# Altium PCB M1-Test-Board.PcbDoc (part 1 of 5)
Units mil, origin at the board's own origin, x right, y up, seen from the top; angles counter-clockwise.
Board outline 3977 x 5000 mil, 4 copper layers (Top, GND Layer 2, Power Layer 3, Bottom), stack 60 mil thick; 191 components, 124 nets, 579 pads, 189 vias.
Unrouted connection lines stored in the file: 80.
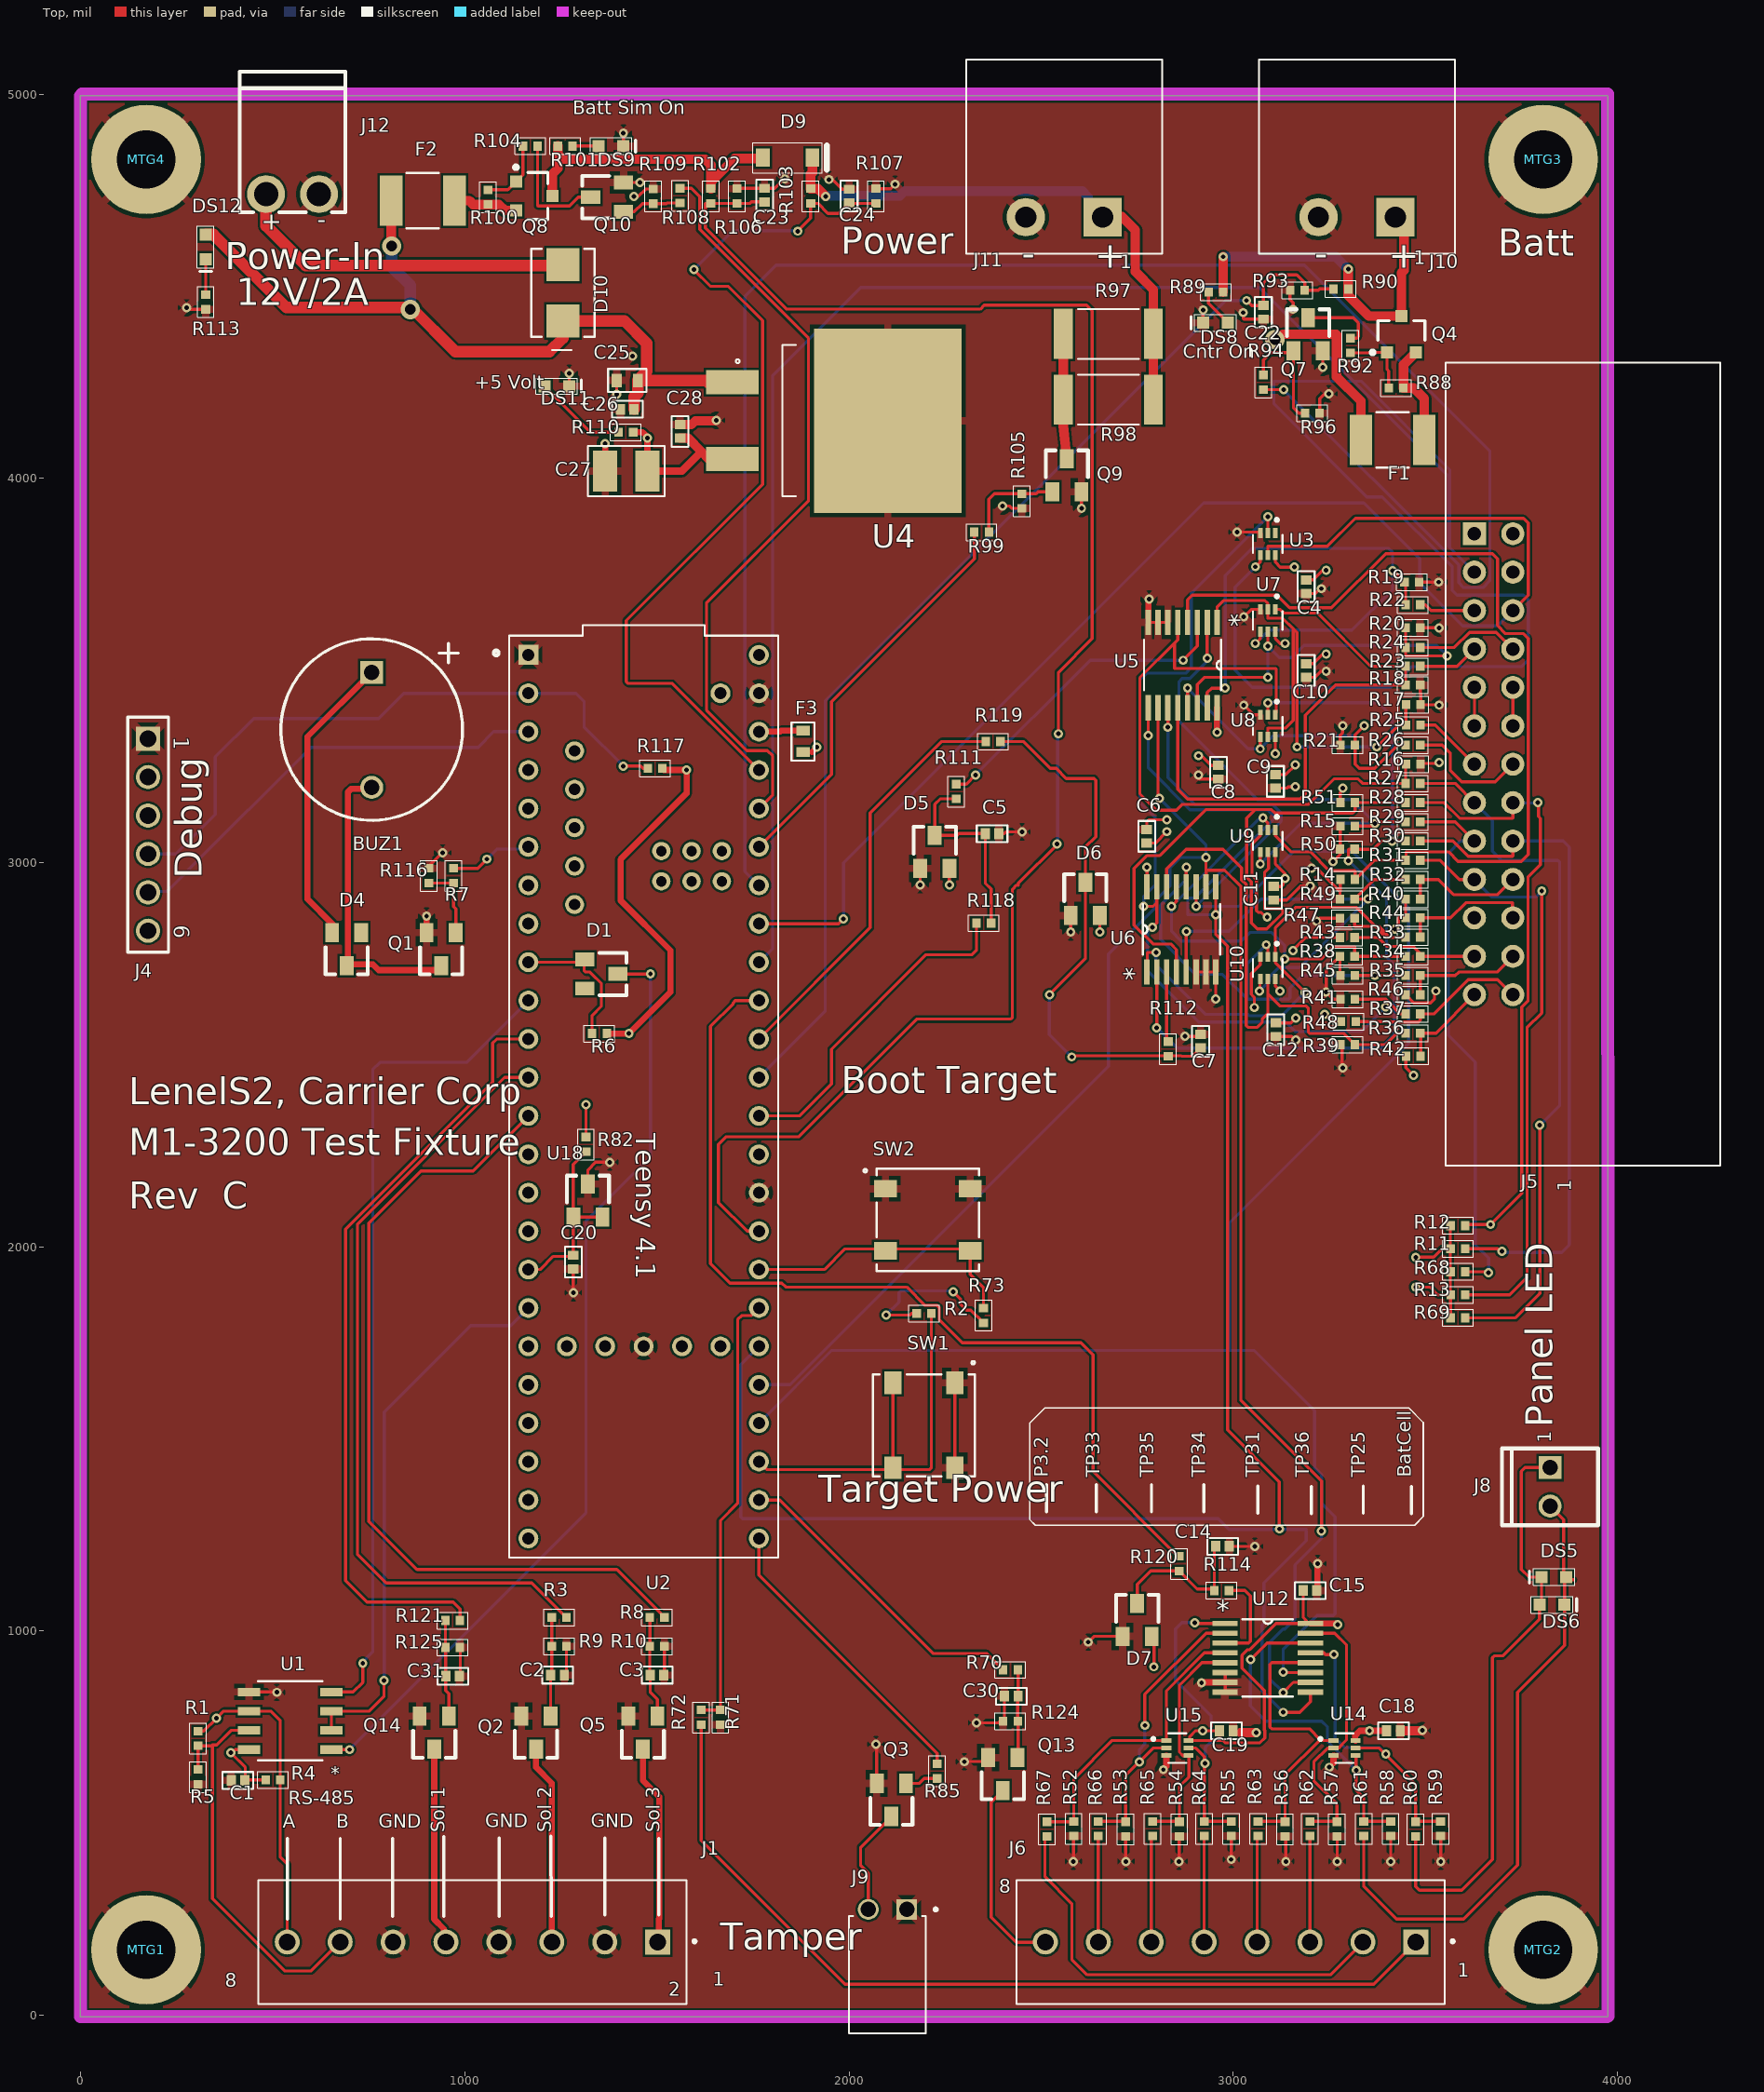
[diagram p0: Top view]
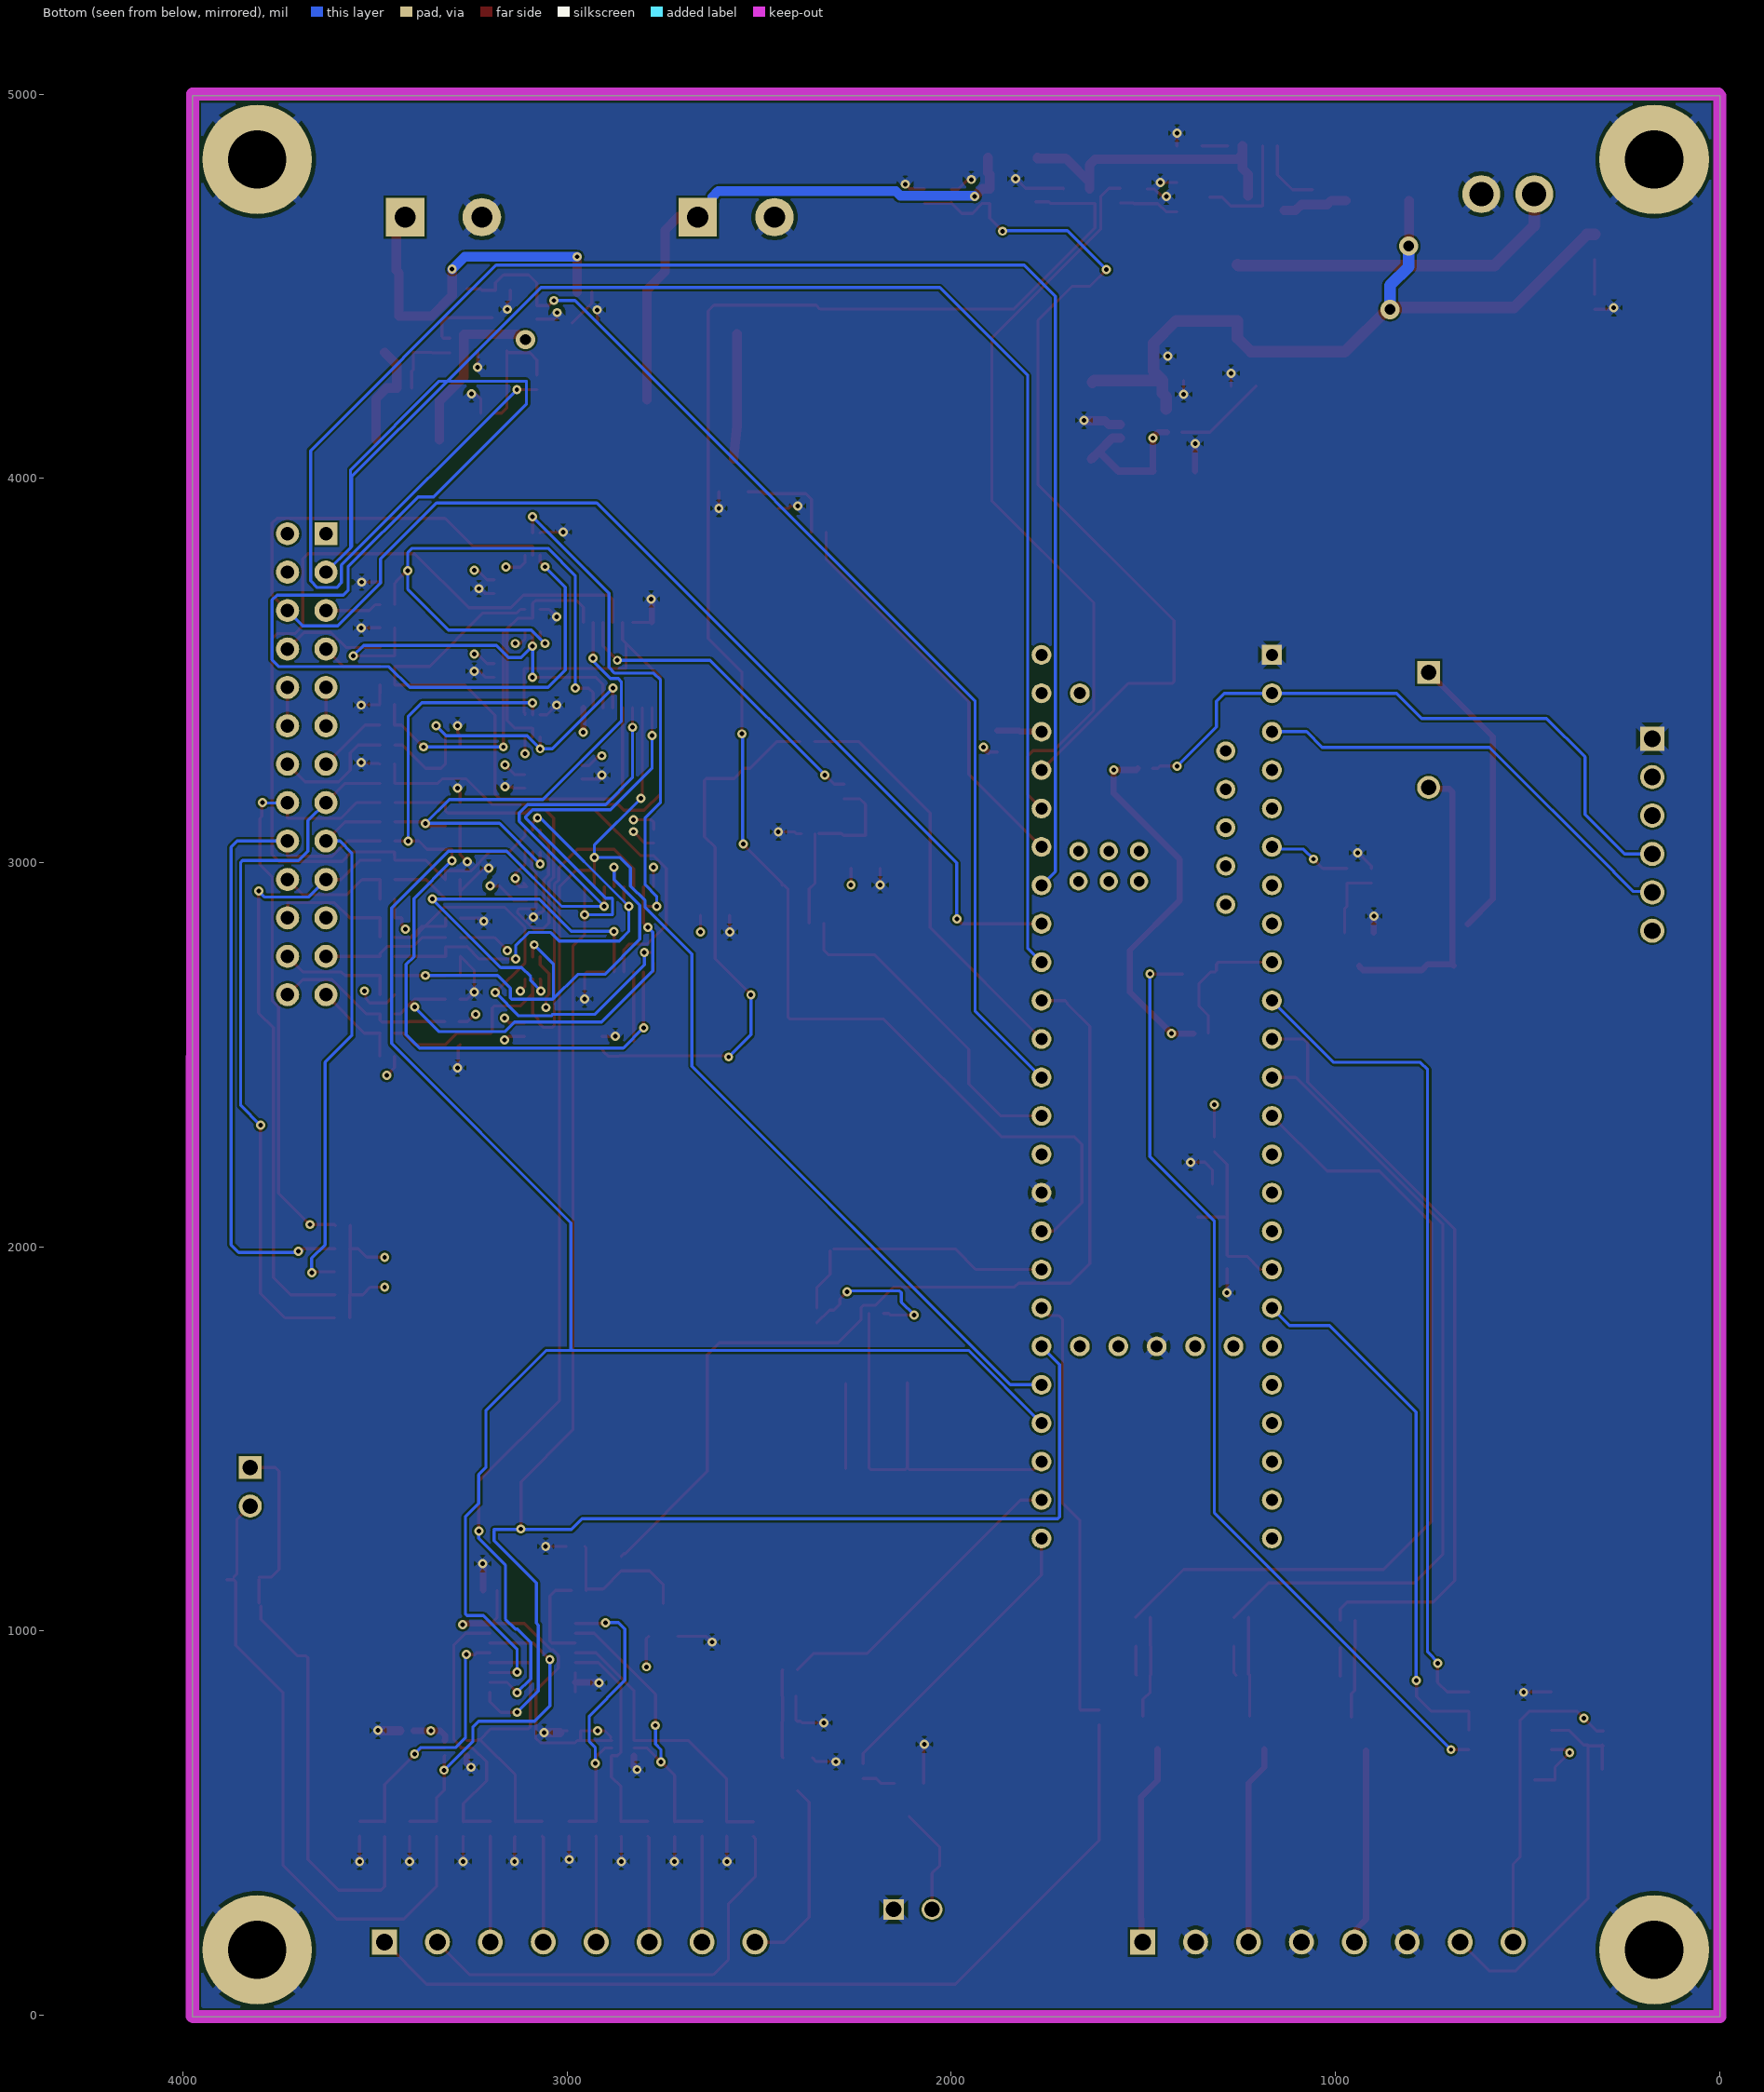
[diagram p1: Bottom view, seen from below]
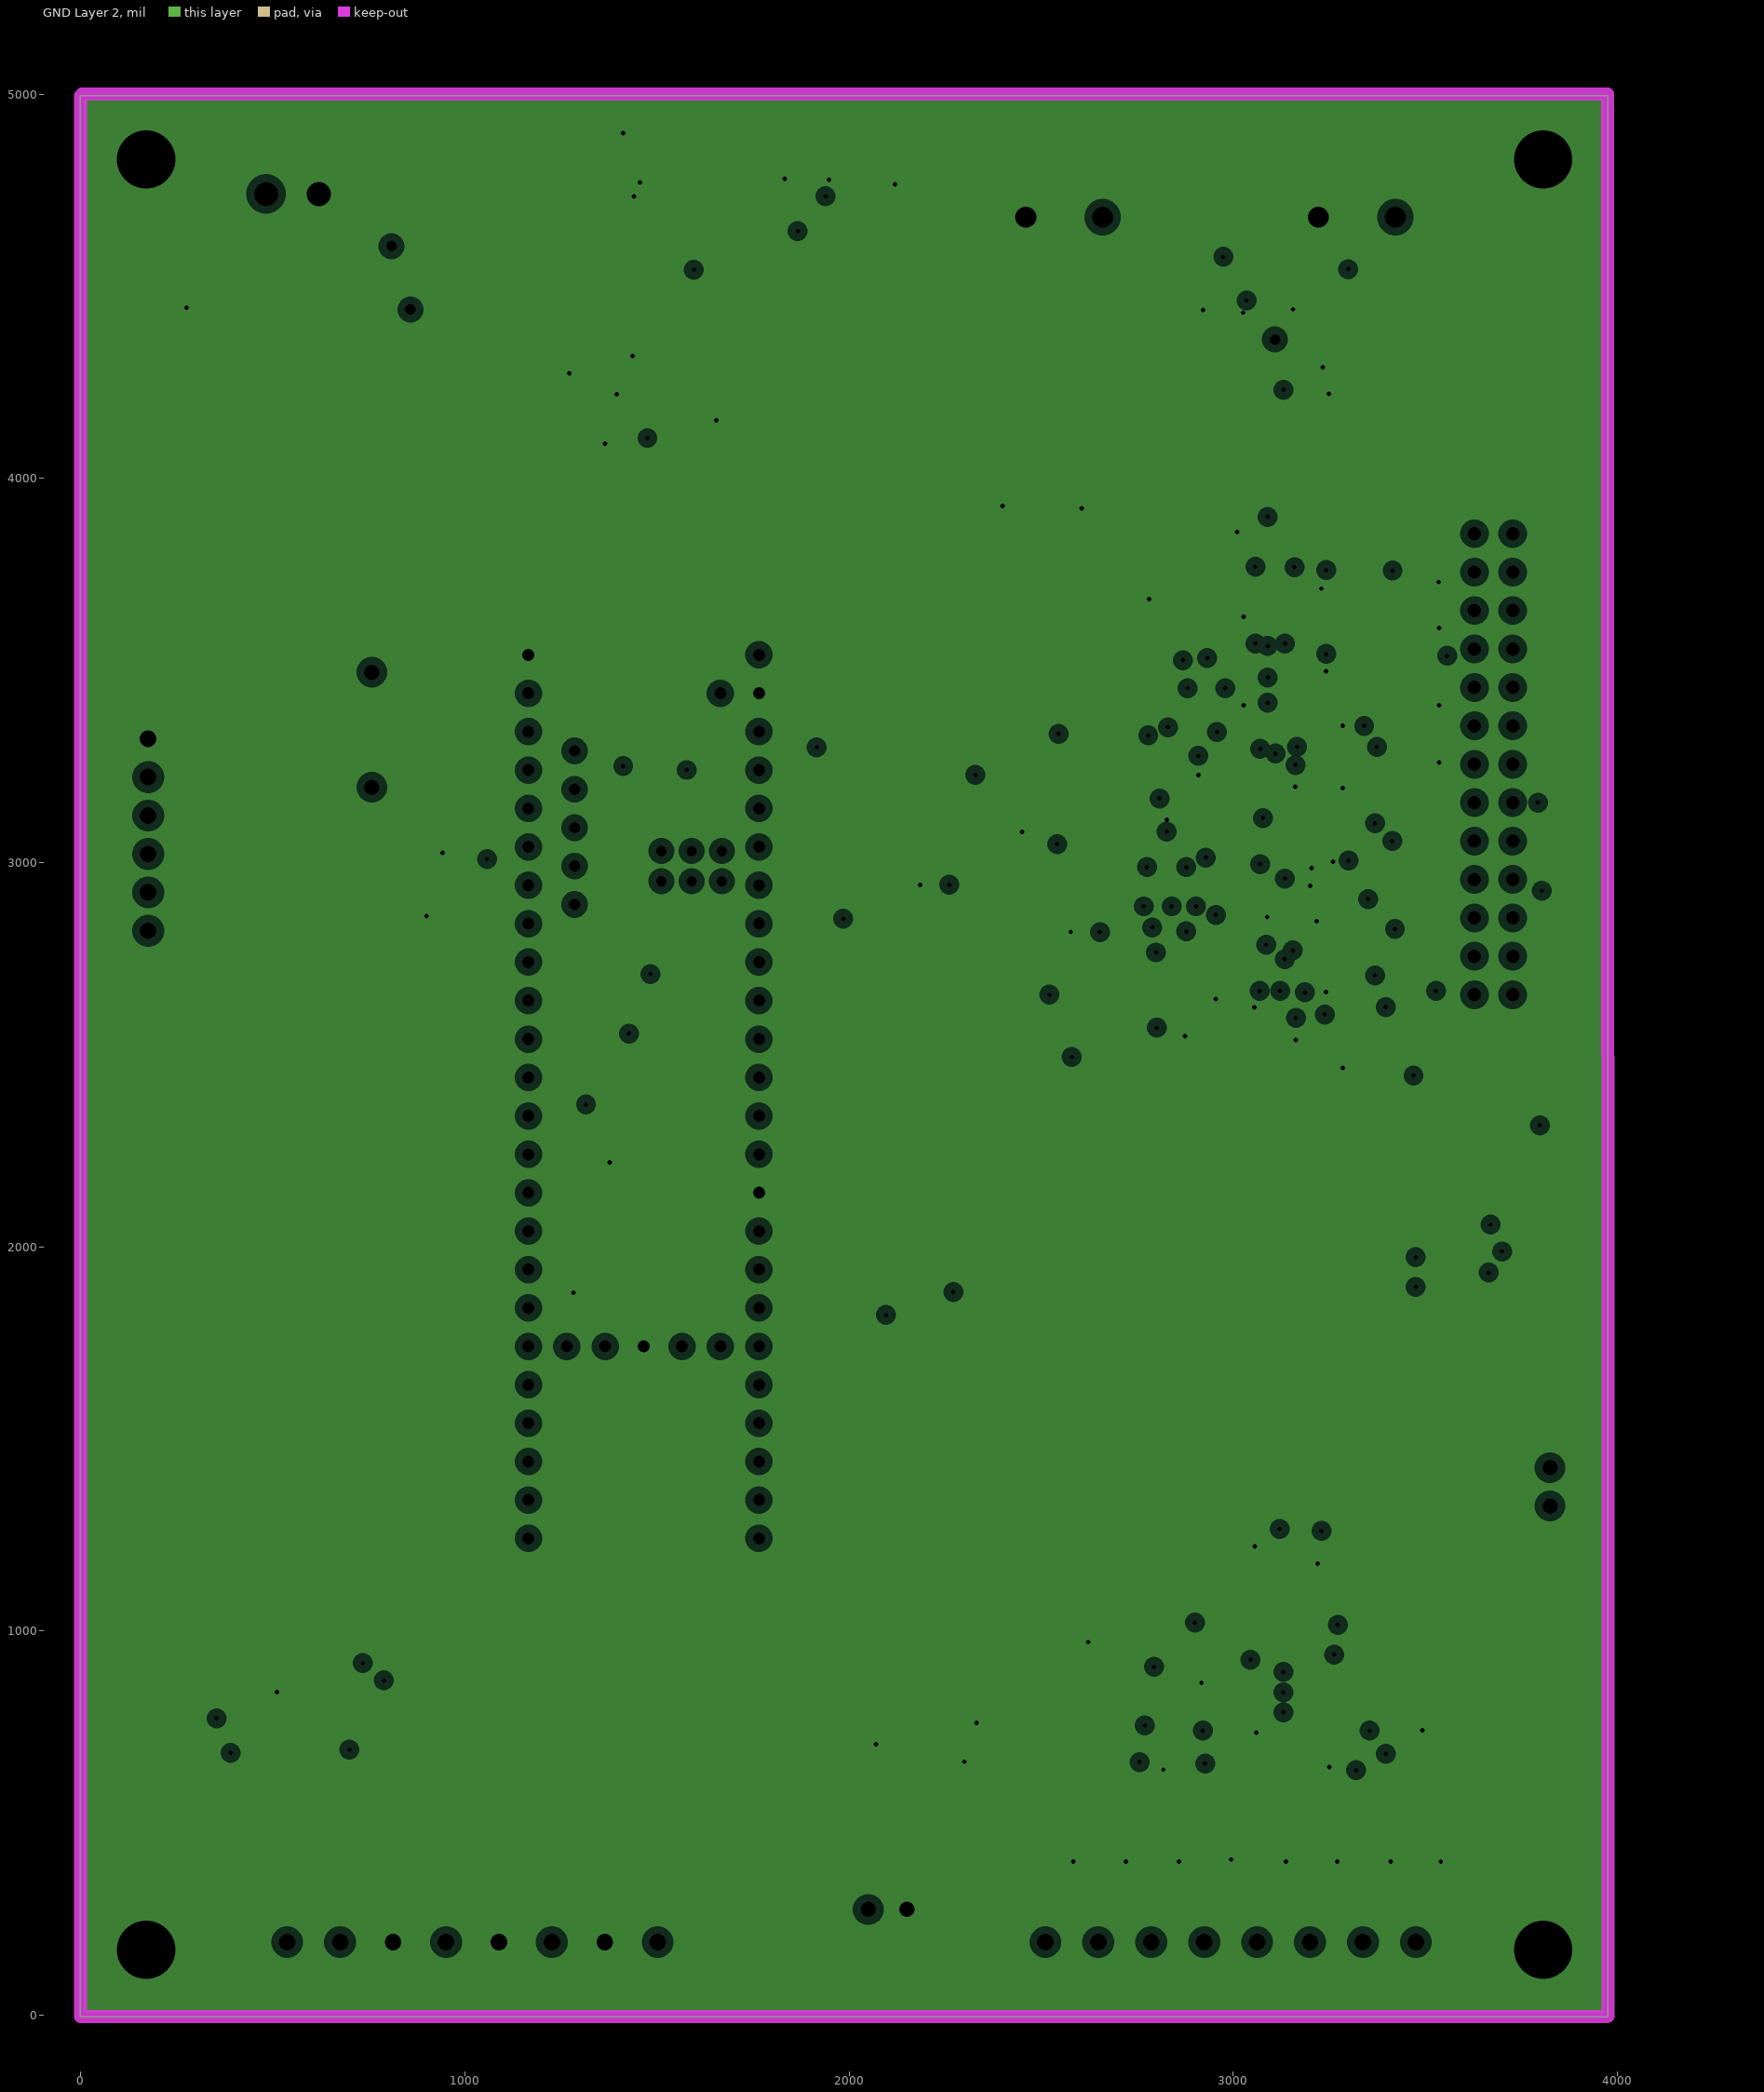
[diagram p2: GND Layer 2, clearances drawn from the general rule]
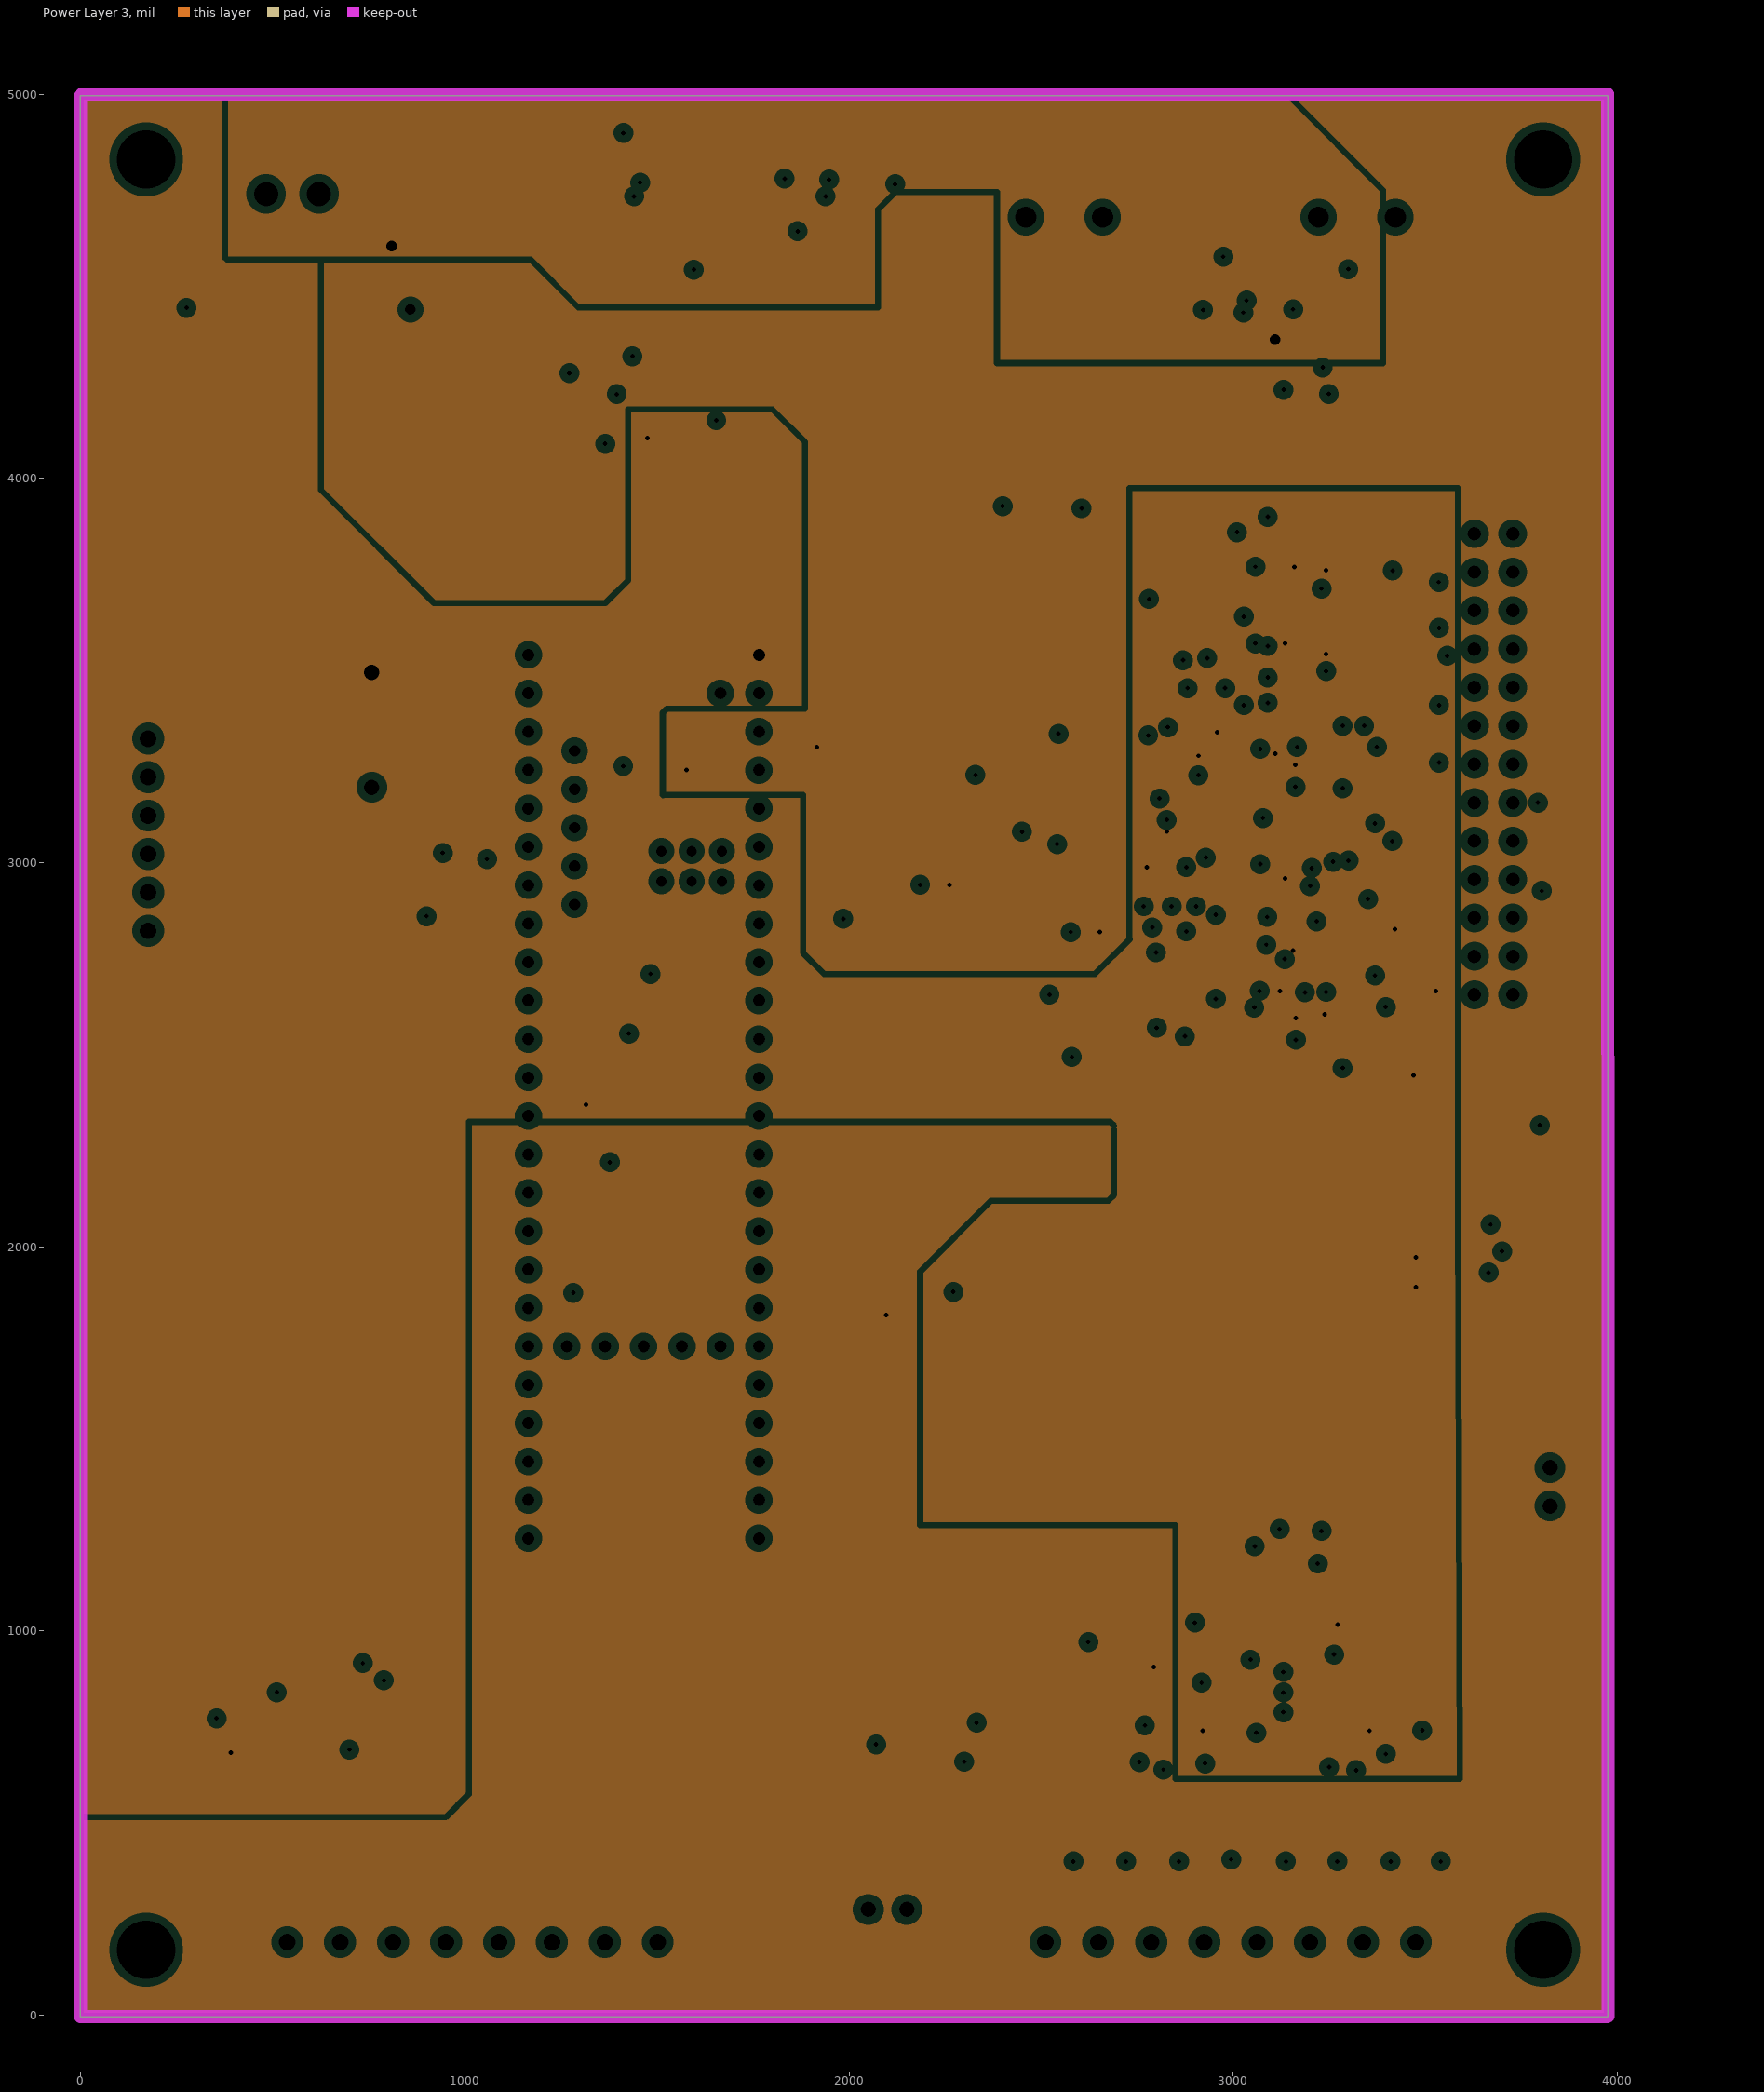
[diagram p3: Power Layer 3, clearances drawn from the general rule]

## Layer stack, top to bottom
Solder Mask Top: solder mask 1, Solder Resist, Dk 3.2
Top: signal copper 0.7
Dielectric 1: prepreg 9.1, 2 x 2116, Dk 4.3
GND Layer 2: plane copper 0.7, net GND
Dielectric2: core 39, Core, Dk 4.6
Power Layer 3: plane copper 0.7, net (Multiple Nets)
Dielectric3: prepreg 9.1, 2 x 2116, Dk 4.3
Bottom: signal copper 0.7
Solder Mask Bottom: solder mask 1, Solder Resist, Dk 3.2

## Board outline
3975,-4 -2,-4 -2,4996 3975,4996

## Design rules (kind name [scope] priority, off if disabled: settings)
BoardOutlineClearance BoardOutlineClearance_1 [InComponent('J5') or InComponent('J10') or InComponent('J11') or  InComponent('J8') or  InComponent('J9') or  InComponent('J1') or  InComponent('J2') or   InComponent('J3') or  InComponent('J12')] p1: gap=0 ignorepadtopadclearanceinfootprint=FALSE
BoardOutlineClearance [All] p2: gap=17 ignorepadtopadclearanceinfootprint=FALSE
Clearance "Clearance NPH" [InNet('NetMTG1_1') or InNet('NetMTG4_1') or InNet('NetMTG2_1') or InNet('NetMTG3_1')] p1: gap=10 ignorepadtopadclearanceinfootprint=FALSE
Clearance "Via in PAd U1" [IsVia and InNet('GND') vs IsSMTPin AND InComponent('U1')] p2: gap=0 ignorepadtopadclearanceinfootprint=TRUE
Clearance "Via in PAd U12" [IsVia and InNet('GND') vs IsSMTPin AND InComponent('U12')] p3: gap=0 ignorepadtopadclearanceinfootprint=TRUE
Clearance "Clearance - NetClass - DIF-PAIRS" [InNetClass('DIF-PAIRS')] p4: gap=6 ignorepadtopadclearanceinfootprint=FALSE
Clearance "Clearance - Default - DEFAULT - Via" [IsVia vs IsVia] p5: gap=6 ignorepadtopadclearanceinfootprint=FALSE
Clearance "Clearance - Default - DEFAULT- SMD" [IsVia vs IsSMTPin] p6: gap=6 ignorepadtopadclearanceinfootprint=TRUE
Clearance "Clearance - Default - DEFAULT - Net_1" [All] p7: gap=5.5 ignorepadtopadclearanceinfootprint=FALSE
ComponentClearance "ComponentClearance - Default - DEFAULT" [All] p1: gap=7 collisioncheckmode=3 verticalgap=10 showdistances=FALSE
DiffPairsRouting DiffPair_100DiffPairsRouting [InDifferentialPairClass('diffpair_100')] p1: maxlimit=6.5 minlimit=6.5 mostfreqgap=6.5 toplayer_minwidth=8 toplayer_maxwidth=8 toplayer_prefwidth=8 bottomlayer_minwidth=8 bottomlayer_maxwidth=8 bottomlayer_prefwidth=8 maxuncoupledlength=500
FanoutControl Fanout_SOIC [IsSOIC] p1: bgadir=Out bgaviamode=Centered fanoutstyle=Auto fanoutdirection=Alternating viagrid=1 // Fanout_SOIC (Default Rule)
FanoutControl Fanout_Small [(CompPinCount < 5)] p2: bgadir=Out bgaviamode=Centered fanoutstyle=Auto fanoutdirection=OutThenIn viagrid=1 // Fanout_Small (Default Rule)
FanoutControl Fanout_LCC [IsLCC] p3: bgadir=Out bgaviamode=Centered fanoutstyle=Auto fanoutdirection=Alternating viagrid=1 // Fanout_LCC (Default Rule)
FanoutControl Fanout_BGA [IsBGA] p4: bgadir=Out bgaviamode=Centered fanoutstyle=Auto fanoutdirection=Alternating viagrid=1 // Fanout_BGA (Default Rule)
HoleSize [All] p1: absolutevalues=TRUE maxlimit=180 minlimit=1 maxpercent=80.000 minpercent=20.000
HoleToHoleClearance "HoleToHoleClearance - Default - DEFAULT" [All] p1: gap=7 allowstackedmicrovias=TRUE
Length "Default Length" [All] p1: maxlimit=50000 minlimit=0
MatchedLengths DiffPair_100MatchedLengths [InDifferentialPairClass('diffpair_100')] p1: tolerance=10 checknetsindiffpair=TRUE checkdiffpairvsdiffpair=FALSE checkxsignals=FALSE checkothers=FALSE
MaxMinImpedance "Default Impedance" [All] p1: minimum=50.00 maximum=150.0
MinimumAnnularRing [All] p1: minimumring=6
MinimumSolderMaskSliver [All] p1: minsoldermaskwidth=1
ParallelSegment "Default Parallel Segment Same Layer" [All] p1: limit=1000 gap=20
ParallelSegment "Default Parallel Segment Adjasent" [All] p2: limit=1000 gap=200
PlaneClearance "PlaneClearance - FootPrint 'RJ45$2F$SI-46001'" [HasFootprint('RJ45$2F$SI-46001')] p1: clearance=15 // PAD - Power Plane Clearance
PlaneConnect "Default PlaneConnect" [All] p1: planeconnectstyle=Relief reliefexpansion=20 reliefentries=4 reliefconductorwidth=20 reliefairgap=10
PolygonConnect "PolygonConnect - Default SMT" [IsSMTPin] p1: connectstyle=Relief reliefconductorwidth=20 reliefentries=4 polygonreliefangle="90 Angle" airgapwidth=10
PolygonConnect "PolygonConnect - Default Pad" [All] p2: connectstyle=Relief reliefconductorwidth=20 reliefentries=4 polygonreliefangle="45 Angle" airgapwidth=10
RoutingLayers "RoutingLayers - Default - DEFAULT" [All] p1: top layer_v5=TRUE bottom layer_v5=TRUE
RoutingPriority "RoutingPriority - Default - DEFAULT" [All] p1: routingpriority=3
RoutingTopology "Default Routing Topology" [All] p1: topology=Shortest
RoutingVias "RoutingVias - Default - DEFAULT" [All] p1: holewidth=12 width=24 viastyle="Through Hole" minholewidth=12 minwidth=24 maxholewidth=20 maxwidth=40
SMDToCorner "SMDToCorner - Default - DEFAULT" [All] p1: distance=20000
SilkToSilkClearance [All] p1: silktosilkclearance=3
SilkToSolderMaskClearance [IsPad] p1: minsilkscreentomaskgap=3 clearancetoexposedcopper=TRUE
SolderMaskExpansion "SolderMaskExpansion from CAM settings" [All] p1: expansion=2 istentingtop=FALSE
Width "Width - NetClass - PWR+GND" [InNetClass('PWR+GND')] p1: maxlimit=250 minlimit=8 preferedwidth=20
Width "Width - NetClass - HI" [InNetClass('HI')] p2: maxlimit=30 minlimit=20 preferedwidth=25
Width "Width - NetClass - DIF-PAIRS" [InNetClass('DIF-PAIRS')] p3: maxlimit=250 minlimit=5 preferedwidth=7
Width "Default Width" [All] p4: maxlimit=250 minlimit=3 preferedwidth=8
14 further rules are at their usual default settings.

## Classes and differential pairs
net class HI: +12V NetD9_1 NetD9_2 NetD10_1 NetF1_2 NetF2_2 NetJ10_1 NetQ9_3
component class RibbonCable: C4 C5 C6 C7 C8 C9 C10 C11 C12 D5 D6 J5 R11 R12 R13 R14 R15 R16 R17 R18 R19 R20 R21 R22 R23 R24 R25 R26 R27 R28 R29 R30 R31 R32 R33 R34 R35 R36 R37 R38 R39 R40 R41 R42 R43 R44 R45 R46 R47 R48 R49 R50 R51 R68 R69 R111 R112 R118 R119 U3 U5 U6 U7 U8 U9 U10
component class InputOutput: C14 C15 C18 C19 D7 DS5 DS6 J6 J8 J9 Q3 R52 R53 R54 R55 R56 R57 R58 R59 R60 R61 R62 R63 R64 R65 R66 R67 R71 R72 R85 R114 R120 U12 U14 U15
component class Teensy: BUZ1 C1 C2 C3 C20 C30 C31 D1 D4 F3 J1 J4 MTG1 MTG2 MTG3 MTG4 Q1 Q2 Q5 Q13 Q14 R1 R2 R3 R4 R5 R6 R7 R8 R9 R10 R70 R73 R82 R116 R117 R121 R124 R125 SW1 SW2 U1 U2 U18
component class Power: C22 C23 C24 C25 C26 C27 C28 D9 D10 DS8 DS9 DS11 DS12 F1 F2 J10 J11 J12 Q4 Q7 Q8 Q9 Q10 R88 R89 R90 R92 R93 R94 R96 R97 R98 R99 R100 R101 R102 R103 R104 R105 R106 R107 R108 R109 R110 R113 U4

## Components (designator, comment, footprint, x,y, rotation, side; value= is the part's Value field where it differs from the comment)
BUZ1 "CEM-1205-IC" BUZZ-MB5120C 757.27,3495 r180 top
C1 "0.1uF" C0402 409,610.71 r180 top
C2 "1uF" C0402 1241,885 r0 top
C3 "1uF" C0402 1500,885 r0 top
C4 "0.1uF" C0402 3190,3718.19 r90 top
C5 "0.1uF" C0402 2372.3,3075 r0 top
C6 "0.1uF" C0402 2775,3068.3 r270 top
C7 "0.1uF" C0402 2915,2535 r90 top
C8 "0.1uF" C0402 2961.57,3235 r90 top
C9 "0.1uF" C0402 3110,3211.3 r90 top
C10 "0.1uF" C0402 3190,3500 r90 top
C11 "0.1uF" C0402 3105,2920 r90 top
C12 "0.1uF" C0402 3111,2565 r90 top
C14 "0.1uF" C0402 2972.3,1220 r0 top
C15 "0.1uF" C0402 3200,1105 r180 top
C18 "0.1uF" C0402 3417.3,740 r180 top locked
C19 "0.1uF" C0402 2982.3,740 r180 top locked
C20 "0.47uF" C0402 1282,1960 r270 top
C22 "1uF" C0402 3078.5,4432.3 r270 top
C23 "1uF" C0402 1780,4737.3 r90 top
C24 "1uF" C0402 2000,4735 r90 top
C25 "4.7uF" C0603 1422.56,4255 r270 top
C26 "0.1uF" C0402 1422.56,4180 r0 top
C27 "47uF" C1210 1420.12,4019 r270 top
C28 "0.1uF" C0402 1560,4122.3 r270 top
C30 "1uF" C0402 2422.3,830 r180 top
C31 "1uF" C0402 968,882 r0 top
D1 "BAT54S" sot23-3 1355,2710 r270 top
D4 "BAT54S" sot23-3 692,2774.42 r180 top
D5 "BAT54S" sot23-3 2223,3028 r0 top
D6 "BAT54S" sot23-3 2615,2905 r0 top locked
D7 "BAT54S" sot23-3 2750,1028.77 r0 top
D9 "B5819W-TP" MCC-SOD123_V 1840,4835 r0 top
D10 "B240Q-13-F" DIODE_DO214AA 1255,4483 r270 top
DS5 "LTST-C193KRKT-5A" LED-RED_0603 3835,1140 r180 top
DS6 "LTST-C193TBKT-5A" LED-BLUE_0603 3830,1067.95 r0 top
DS8 "LTST-C193KSKT-5A" LED-YELLOW_0603 2953.98,4405 r180 top
DS9 "LTST-C193KFKT-5A" LED-ORANGE_0603 1380,4865 r0 top
DS11 "LTST-C193TGKT-5A" LED-GREEN_0603 1239.09,4240 r0 top
DS12 "LTST-C193KRKT-5A" LED-RED_0603 325,4602.48 r270 top
F1 "500mA" FUSE_F050-2 3415,4100 r0 top locked
F2 "500mA" FUSE_F050-2 890,4723.07 r0 top
F3 "50mA" F0603 1880,3315 r0 top locked
J1 "284391-8" TE_284391-8 1019.49,190 r180 top
J4 "61300611121" 61300611121 175,3072.42 r270 top
J5 "N3429-5202RB" CONN_N3429-5202RB 3628,3856 r270 top locked
J6 "284391-8" TE_284391-8 2993.31,190 r180 top
J8 "640454-2" CON$5C$2P$5C$100LM 3825,1425 r270 top
J9 "640457-2" TE_640457-2 2150,275 r180 top
J10 "Green 5.08mm" Conn_5433668 3422,4680 r0 top
J11 "Gray 5.08mm" Conn_5442002 2660,4680 r0 top
J12 "EBSA-02-A" CONN-TH_2P-P3.50_JL15EDGRC-35002G01 551.1,4740 r180 top
MTG1 "152mil" MNT-HOLE-169-350#1 160,160 r0 top
MTG2 "152mil" MNT-HOLE-169-350#2 3800,180 r0 top locked
MTG3 "152mil" MNT-HOLE-169-350#3 3800,4830 r0 top
MTG4 "152mil" MNT-HOLE-169-350#4 170,4810.98 r0 top
Q1 "MMBT3904" sot23-3 938,2774.42 r180 top
Q2 "MMBT3904" sot23-3 1185,735 r180 top
Q3 "MMBT3904" sot23-3 2110,560 r180 top
Q4 "AO3401A" AO-SOT-23-3L_V 3437.88,4375 r90 top
Q5 "MMBT3904" sot23-3 1463,735 r180 top
Q7 "MMBT3904" sot23-3 3195,4375 r0 top
Q8 "AO3401A" AO-SOT-23-3L_V 1180,4735 r0 top
Q9 "MMBT3904" sot23-3 2567,4008 r0 top locked
Q10 "MMBT3904" sot23-3 1370,4732.13 r90 top
Q13 "MMBT3904" sot23-3 2400,626.93 r180 top
Q14 "MMBT3904" sot23-3 920,735 r180 top
R1 "120R" R0402 305,720 r90 top
R2 "10K 1%" R0402 2195,1826.16 r180 top
R3 "10K 1%" R0402 1245,1035 r180 top
R4 "330R 1%" R0402 500,612.21 r180 top
R5 "330R 1%" R0402 305,620 r270 top
R6 "5.1K 1%" R0402 1350,2555 r0 top
R7 "1K 1%" R0402 970,2965.87 r270 top
R8 "10K 1%" R0402 1500,1035 r180 top
R9 "100K 1%" R0402 1245,960 r0 top
R10 "100K 1%" R0402 1500,960 r0 top
R11 "51K 1%" R0402 3585,1995 r180 top
R12 "51K 1%" R0402 3585,2055 r180 top
R13 "51K 1%" R0402 3585.09,1875 r0 top
R14 "51K 1%" R0402 3298,2956 r0 top
R15 "51K 1%" R0402 3298,3095 r0 top
R16 "51K 1%" R0402 3468.91,3256 r180 top
R17 "2.8K 1%" R0402 3468.91,3411 r180 top
R18 "8.2K 1%" R0402 3468,3462.02 r180 top
R19 "8.2K 1%" R0402 3465,3730 r180 top
R20 "8.2K 1%" R0402 3468,3611 r180 top
R21 "2.8K 1%" R0402 3298,3306 r0 top
R22 "10K 1%" R0402 3468,3671 r0 top
R23 "10K 1%" R0402 3468,3511 r0 top
R24 "10K 1%" R0402 3468,3559.79 r180 top
R25 "10K 1%" R0402 3468.91,3357.95 r0 top
R26 "10K 1%" R0402 3468,3306 r180 top
R27 "10K 1%" R0402 3468,3206 r0 top
R28 "10K 1%" R0402 3468,3156 r180 top
R29 "10K 1%" R0402 3468,3106 r0 top
R30 "10K 1%" R0402 3468,3056 r180 top
R31 "10K 1%" R0402 3468,3005.88 r0 top
R32 "10K 1%" R0402 3468,2956 r180 top
R33 "10K 1%" R0402 3468,2806 r180 top
R34 "10K 1%" R0402 3468,2756 r0 top
R35 "10K 1%" R0402 3468,2706 r180 top
R36 "10K 1%" R0402 3468,2556 r0 top
R37 "10K 1%" R0402 3468,2606 r180 top
R38 "10K 1%" R0402 3297.09,2756 r180 top
R39 "10K 1%" R0402 3298,2526 r180 top
R40 "10K 1%" R0402 3468,2904.98 r0 top
R41 "10K 1%" R0402 3298,2644.19 r0 top
R42 "10K 1%" R0402 3468.91,2496 r180 top
R43 "10K 1%" R0402 3297.09,2805 r180 top
R44 "10K 1%" R0402 3468,2856 r0 top
R45 "10K 1%" R0402 3298,2706 r0 top
R46 "10K 1%" R0402 3468,2656 r0 top
R47 "10K 1%" R0402 3297.09,2855 r0 top
R48 "10K 1%" R0402 3299.93,2586 r0 top
R49 "10K 1%" R0402 3297.09,2904.98 r0 top
R50 "51K 1%" R0402 3297.09,3034.79 r0 top
R51 "51K 1%" R0402 3298,3156 r0 top
R52 "10K 1%" R0402 2585,485 r90 top locked
R53 "51K 1%" R0402 2720,484.09 r90 top locked
R54 "51K 1%" R0402 2860,484.09 r90 top locked
R55 "51K 1%" R0402 2995,485 r90 top locked
R56 "51K 1%" R0402 3135,484.09 r90 top locked
R57 "51K 1%" R0402 3270,484.09 r90 top locked
R58 "2.8K 1%" R0402 3410,485 r90 top locked
R59 "2.8K 1%" R0402 3540,485 r90 top
R60 "10K 1%" R0402 3475,484.09 r270 top
R61 "10K 1%" R0402 3340,485 r270 top locked
R62 "10K 1%" R0402 3200,485 r270 top locked
R63 "10K 1%" R0402 3065,485 r270 top locked
R64 "10K 1%" R0402 2925,485 r270 top locked
R65 "10K 1%" R0402 2790,485 r270 top locked
R66 "10K 1%" R0402 2648.82,485 r270 top locked
R67 "10K 1%" R0402 2515,484.09 r270 top locked
R68 "51K 1%" R0402 3585,1935 r0 top
R69 "51K 1%" R0402 3585,1815 r0 top
R70 "10K 1%" R0402 2420,898.61 r0 top
R71 "51K 1%" R0402 1665.2,775 r90 top
R72 "51K 1%" R0402 1615,775 r270 top
R73 "10K 1%" R0402 2350,1820.99 r270 top
R82 "330R 1%" R0402 1315,2266.38 r270 top
R85 "1K 1%" R0402 2229.03,635 r270 top locked
R88 "10K 1%" R0402 3424.09,4235 r180 top locked
R89 "5.1K 1%" R0402 2955,4485 r0 top
R90 "10K 1%" R0402 3280.36,4493 r0 top
R92 "10K 1%" R0402 3305,4345.91 r90 top
R93 "2.8K 1%" R0402 3167.21,4490 r180 top
R94 "10K 1%" R0402 3078.5,4250 r90 top locked
R96 "100K 1%" R0402 3205.91,4170 r0 top locked
R97 "220R 5%" RESC6331X75N 2675,4376.02 r180 top
R98 "220R 5%" RESC6331X75N 2675,4205 r180 top locked
R99 "10K 1%" R0402 2345,3860 r0 top locked
R100 "10K 1%" R0402 1060,4732.13 r90 top
R101 "5.1K 1%" R0402 1260.91,4865 r180 top
R102 "10K 1%" R0402 1640,4735 r90 top
R103 "10K 1%" R0402 1900,4735 r90 top
R104 "10K 1%" R0402 1170,4865 r0 top
R105 "100K 1%" R0402 2450,3940.91 r270 top locked
R106 "2.8K 1%" R0402 1708,4735 r90 top
R107 "2.8K 1%" R0402 2070,4735 r90 top
R108 "10K 1%" R0402 1560,4735.91 r270 top
R109 "100K 1%" R0402 1490,4734.09 r90 top
R110 "680R 1%" R0402 1418.91,4120 r180 top
R111 "2.8K 1%" R0402 2279,3185 r90 top locked
R112 "2.8K 1%" R0402 2830.73,2515 r90 top
R113 "5.1K 1%" R0402 325,4459.09 r270 top
R114 "2.8K 1%" R0402 2970,1105 r0 top
R116 "100K 1%" R0402 905.91,2965.86 r90 top
R117 "10K 1%" R0402 1495,3245 r0 top
R118 "10K 1%" R0402 2350.7,2842.52 r0 top
R119 "10K 1%" R0402 2375,3315 r0 top
R120 "10K 1%" R0402 2859.1,1175 r270 top
R121 "10K 1%" R0402 968,1027 r180 top
R124 "100K 1%" R0402 2420,765 r180 top
R125 "100K 1%" R0402 968,957 r0 top
SW1 "KSC441J70SHLFS" SON4_KSC741JLFS_CNK-red 2195,1535 r270 top
SW2 "KSC741J LFS" SON4_KSC741JLFS_CNK-blue 2205,2070 r0 top
U1 "SP485EEN-L/TR-ND" NSOIC-8 545,766 r180 top
U2 "Teensy 4.1" "MODULE_DEV-16771 - headers" 1465.2,2390.63 r270 top locked
U3 "TPD4E001DRLR" SOTFL50P160X60-6N 3090,3828.94 r270 top
U4 "L7805CD2T-TR" VREG_L7805ACD2T 1960,4150 r0 top
U5 "CD74HC4051PWR" 16-TSSOP-4.4MM 2868.39,3514 r270 top
U6 "CD74HC4051PWR" 16-TSSOP-4.4MM 2865,2826 r90 top
U7 "TPD4E001DRLR" SOTFL50P160X60-6N 3090,3630 r270 top
U8 "TPD4E001DRLR" SOTFL50P160X60-6N 3090,3356 r270 top
U9 "TPD4E001DRLR" SOTFL50P160X60-6N 3090,3056 r270 top
U10 "TPD4E001DRLR" SOTFL50P160X60-6N 3090,2725.79 r270 top
U12 "CD74HC4051PWR" 16-TSSOP-4.4MM 3090,930 r0 top locked
U14 "TPD4E001DRLR" SOTFL50P160X60-6N 3290,695 r0 top locked
U15 "TPD4E001DRLR" SOTFL50P160X60-6N 2855,695 r0 top locked
U18 "NCP431AVSNT1G" sot23-3 1320,2120 r0 top

## Footprints (in the part's own frame and the unit in brackets; to place one, negate y for a bottom-side part, rotate by r counter-clockwise, add the part's x,y. Pads: shape width x height; smd on the part's side, far side on the other; paste and mask are expansions set on the pad)
16-TSSOP-4.4MM [mil]
  rect 66x14 smd: 1(-111,89.57) 2(-111,63.98) 3(-111,38.39) 4(-111,12.8) 5(-111,-12.8) 6(-111,-38.39) 7(-111,-63.98) 8(-111,-89.57) 9(111,-89.57) 10(111,-63.98) 11(111,-38.39) 12(111,-12.8) 13(111,12.8) 14(111,38.39) 15(111,63.98) 16(111,89.57)
  silkscreen extent -66,-101 66,101, body extent -130,-101 130,101, height 47
61300611121 [mm] "Pin Header, pitch 2.54 mm, THT, Vertical, single row, 6p"
  rect 1.6x1.6 hole 1.1: 1(-6.35,0)
  round 1.6 hole 1.1: 2(-3.81,0) 3(-1.27,0) 4(1.27,0) 5(3.81,0) 6(6.35,0)
  silkscreen extent -7.77,-1.35 7.77,1.35, body extent -7.62,-1.27 7.62,1.27, height 8.57
AO-SOT-23-3L_V [mm] "SOT23, 3-Leads, Body 3.1x1.8mm, Pitch 0.95mm"
  rect 0.8x0.8 smd: 1(-1.2,0.95) 2(-1.2,-0.95) 3(1.2,0)
  silkscreen extent -1.32,-1.55 0.9,2.02, body extent -1.5,-1.58 1.5,1.52, height 1.25
BUZZ-MB5120C [mil]
  rect 60x60 / inner round 60 / far side rect 60x60 hole 40: 1(0,0)
  round 60 hole 40: 2(0,299.21)
  silkscreen extent -236,-87 236,385, body extent -234,-86 238,386, height 355
C0402 [mil]
  rect 24x28 smd: 1(-17.7,0) 2(17.7,0)
  silkscreen extent -40,-22 40,22, body extent -21,-11 21,11, height 22
C0603 [mm]
  rect 0.9x0.65 smd: 1(0,0.71) 2(0,-0.7)
  silkscreen extent -0.76,-1.27 0.76,1.27, body extent -0.48,-0.87 0.48,0.87, height 0.87
C1210 [mm]
  rect 2.7x1.6 smd: 1(0,1.397) 2(0,-1.397)
  silkscreen extent -1.65,-2.54 1.65,2.54, body extent -0.9,-1.7 0.9,1.7, height 0.94
CON$5C$2P$5C$100LM [mil]
  rect 60x60 hole 40: 1(0,0)
  round 60 hole 40: 2(100,0)
  silkscreen extent -50,-125 150,125, body extent -53,-123 147,108, height 370
CONN-TH_2P-P3.50_JL15EDGRC-35002G01 [mm]
  round 2.5 hole 1.6: 1(-1.75,0) 2(1.75,0)
  silkscreen extent -3.5,-8.1 3.5,1.2, body extent -3.92,-8.03 3.68,1.17, height 6.91
Conn_5433668 [mil]
  rect 100x100 hole 55 mask+3: 1(0,0)
  round 100 hole 55 mask+3: 2(-200,0)
  silkscreen extent -355,-95 155,410, body extent -339,-79 139,394, height 339
Conn_5442002 [mil]
  rect 100x100 hole 55 mask+3: 1(0,0)
  round 100 hole 55 mask+3: 2(-200,0)
  silkscreen extent -355,-95 155,410, body extent -339,-79 139,394, height 339
CONN_N3429-5202RB [mil]
  rect 60x60 hole 35.04: 1(0,0)
  round 60 hole 35.04: 2(0,100) 3(100,0) 4(100,100) 5(200,0) 6(200,100) 7(300,0) 8(300,100) 9(400,0) 10(400,100) 11(500,0) 12(500,100) 13(600,0) 14(600,100) 15(700,0) 16(700,100) 17(800,0) 18(800,100) 19(900,0) 20(900,100) 21(1000,0) 22(1000,100) 23(1100,0) 24(1100,100) 25(1200,0) 26(1200,100)
  silkscreen extent -445,-75 1645,640, body extent -435,-52 1625,1003, height 366
DIODE_DO214AA [mil]
  rect 86x86 smd: 1(-73,0) 2(73,0)
  silkscreen extent -115,-83 149,83, body extent -110,-77 110,77, height 98
F0603 [mm]
  rect 0.9x0.65 smd: 1(0,0.71) 2(0,-0.7)
  silkscreen extent -0.76,-1.27 0.76,1.27, body extent -0.44,-0.85 0.44,0.85, height 0.56
FUSE_F050-2 [mil]
  rect 59x130 smd paste+0 mask+0: 1(-82.5,0) 2(82.5,0)
  silkscreen extent -42,-72 42,72, body extent -93,-67 93,67, height 33
LED-BLUE_0603 [mm] "SMD, 2-Leads, Body 1.6x0.8mm"
  rect 0.8x0.8 smd: 1(-0.825,0) 2(0.825,0)
  silkscreen extent -1.37,-0.56 1.62,0.56, body extent -0.8,-0.4 0.8,0.4, height 0.4
LED-GREEN_0603 [mm] "SMD, 2-Leads, Body 1.6x0.8mm"
  rect 0.8x0.8 smd: 1(-0.825,0) 2(0.825,0)
  silkscreen extent -1.37,-0.53 1.62,0.53, body extent -0.8,-0.4 0.8,0.4, height 0.4
LED-ORANGE_0603 [mm] "SMD, 2-Leads, Body 1.6x0.8mm"
  rect 0.8x0.8 smd: 1(-0.825,0) 2(0.825,0)
  silkscreen extent -1.37,-0.56 1.62,0.56, body extent -0.8,-0.4 0.8,0.4, height 0.4
LED-RED_0603 [mm] "SMD, 2-Leads, Body 1.6x0.8mm"
  rect 0.8x0.8 smd: 1(-0.825,0) 2(0.825,0)
  silkscreen extent -1.37,-0.56 1.62,0.53, body extent -0.8,-0.4 0.8,0.4, height 0.4
LED-YELLOW_0603 [mm] "SMD, 2-Leads, Body 1.6x0.8mm"
  rect 0.8x0.8 smd: 1(-0.825,0) 2(0.825,0)
  silkscreen extent -1.4,-0.56 1.62,0.56, body extent -0.8,-0.4 0.8,0.4, height 0.4
MCC-SOD123_V [mil] "SOD123, 2-Leads, Body 2.7x1.6mm, Height 1.35mm"
  rect 35.98x47.99 smd: 1(-64.5,0) 2(64.5,0)
  silkscreen extent -90,-39 102,39, body extent -53,-30 53,32, height 53
MNT-HOLE-169-350#1 [mil]
  round 285 / inner round 200 / far side round 285 hole 152: 1(10,10)
MNT-HOLE-169-350#2 [mil]
  round 285 / inner round 200 / far side round 285 hole 152: 1(7,-10)
MNT-HOLE-169-350#3 [mil]
  round 285 / inner round 200 / far side round 285 hole 152: 1(7,0)
MNT-HOLE-169-350#4 [mil]
  round 285 / inner round 200 / far side round 285 hole 152: 1(0,19.02)
"MODULE_DEV-16771 - headers" [mm]
  round 1.308 hole 0.8: 0(-26.67,-7.62) 1(-24.13,-7.62) 2(-21.59,-7.62) 3(-19.05,-7.62) 3.3V_1(6.35,-7.62) 3.3V_2(-24.13,7.62) 3.3V_3(16.51,-2.54) 4(-16.51,-7.62) 5(-13.97,-7.62) 6(-11.43,-7.62) 7(-8.89,-7.62) 8(-6.35,-7.62) 9(-3.81,-7.62) 10(-1.27,-7.62) 11(1.27,-7.62) 12(3.81,-7.62) 13(3.81,7.62) 14(1.27,7.62) 15(-1.27,7.62) 16(-3.81,7.62) 17(-6.35,7.62) 18(-8.89,7.62) 19(-11.43,7.62) 20(-13.97,7.62) 21(-16.51,7.62) 22(-19.05,7.62) 23(-21.59,7.62) 24(8.89,-7.62) 25(11.43,-7.62) 26(13.97,-7.62) 27(16.51,-7.62) 28(19.05,-7.62) 29(21.59,-7.62) 30(24.13,-7.62) 31(26.67,-7.62) 32(29.21,-7.62) 33(29.21,7.62) 34(26.67,7.62) 35(24.13,7.62) 36(21.59,7.62) 37(19.05,7.62) 38(16.51,7.62) 39(13.97,7.62) 40(11.43,7.62) 41(8.89,7.62) GND2(6.35,7.62) GND3(-26.67,7.62) GND4(16.51,0) ON/OFF(16.51,5.08) PROGRAM(16.51,2.54) VBAT(16.51,-5.08) VIN(-29.21,7.62) VUSB(-26.67,5.08)
  round 1.258 hole 0.75: 5V(-22.86,-4.57) D+(-17.78,-4.57) D-(-20.32,-4.57) USB_GND1(-15.24,-4.57) USB_GND2(-12.7,-4.57)
  rect 1.308x1.308 hole 0.8: GND1(-29.21,-7.62)
  round 1.208 hole 0.7: GND5(-14.24,3.17) LED(-16.24,3.17) R+(-16.24,5.17) R-(-14.24,5.17) T+(-14.24,1.17) T-(-16.24,1.17)
  silkscreen extent -31.18,-9.91 30.48,8.89, body extent -30.66,-9.4 30.35,9.27, height 8.14
NSOIC-8 [mil]
  rect 57.5x22 smd paste+0 mask+0: 1(-107.25,75) 2(-107.25,25) 3(-107.25,-25) 4(-107.25,-75) 5(107.25,-75) 6(107.25,-25) 7(107.25,25) 8(107.25,75)
  silkscreen extent -84,-104 84,104, body extent -122,-99 122,99, height 69
R0402 [mm] "Generic R0402 Resistor"
  rect 0.56x0.6 smd: 1(-0.485,0) 2(0.485,0)
  silkscreen extent -1.01,-0.55 1.01,0.55, body extent -0.52,-0.28 0.52,0.28, height 0.41
RESC6331X75N [mm]
  rect 1.26x3.32 smd: 1(-2.975,0) 2(2.975,0)
  silkscreen extent -2.02,-1.65 2.02,1.65, body extent -3.25,-1.73 3.25,1.73, height 0.71
SON4_KSC741JLFS_CNK-blue [mil]
  rect 59x45 smd paste+0 mask+0: 1(-110.5,80.71) 2(110.5,80.71) 3(110.5,-80.71) 4(-110.5,-80.71)
  silkscreen extent -167,-133 133,133, body extent -118,-123 126,123, height 166
SON4_KSC741JLFS_CNK-red [mil]
  rect 59x45 smd paste+0 mask+0: 1(-110.5,80.71) 2(110.5,80.71) 3(110.5,-80.71) 4(-110.5,-80.71)
  silkscreen extent -167,-133 133,133, body extent -133,-126 135,122, height 201
sot23-3 [mil]
  rect 36x50 smd: 1(-38,-43) 2(38,-43) 3(0,43)
  silkscreen extent -55,-5 55,65, body extent -60,-52 60,52, height 44
SOTFL50P160X60-6N [mm]
  rect 0.66x0.31 smd: 1(-0.735,0.5) 2(-0.735,0) 3(-0.735,-0.5) 4(0.735,-0.5) 5(0.735,0) 6(0.735,0.5)
  silkscreen extent -1.7,-0.97 0.6,0.97, body extent -0.8,-0.8 0.8,0.8, height 0.56
TE_284391-8 [mm]
  rect 1.65x1.65 hole 1.1: 1(-12.25,0)
  round 1.65 hole 1.1: 2(-8.75,0) 3(-5.25,0) 4(-1.75,0) 5(1.75,0) 6(5.25,0) 7(8.75,0) 8(12.25,0)
  silkscreen extent -14.78,-4.1 14.15,4.1, body extent -14.38,-4.14 14.12,4.06, height 12.61
TE_640457-2 [mm]
  rect 1.37x1.37 hole 1.02: 1(0,0)
  round 1.37 hole 1.02: 2(2.54,0)
  silkscreen extent -2.02,-0.1 3.81,8.19, body extent -1.3,-0.3 3.78,10.74, height 5.85
VREG_L7805ACD2T [mm]
  rect 3.5x1.6 smd: 1(-6.7,2.54) 3(-6.7,-2.54)
  rect 9.75x12.2 smd paste-7: 4(3.575,0)
  silkscreen extent -6.48,-5 -2.51,5, body extent -7.71,-5.1 7.71,5.1, height 4.61

## Part data
BUZ1: library part Mod-0003, "12 mm, 5 Vdc, 92 dB, Through Hole, Driving Circuit, Magnetic Audio Indicator Buzzer", ADI Part Number=3716-0001, Current=35mA, JLCPCB_PART=NA, LCSC Part Number=N/A, Manufacturer="CUI Devices", Supplier Part Number 1=490-CEM1205IC, Voltage=5V, Category=Buzzers, CLASS=DISCRETE, COMPFIXED=NO, COMPGROUP=0, COMPHEIGHT=0.000, COMPKEY=NO, COMPLOC=[1301.000,1659.000], COMPLOCKED=NO, COMPROT=180, COMPSIDE=TOP, DECOUPLER=NO, Manufacturer Part Number=CEM-1205-IC, Mount="Through Hole", Part Name=Mod-0003, PCB Footprint=BUZZ-MB5120C, Pricing 1="1=1.87000, 10=1.55000, 50=1.35000, 100=1.2700", RoHS=Yes, S2 PN=S2-BZ-0001, S2PN=S2-BZ-0001, Stock 1=774, Supplier 1=Mouser
C1 C4 C5 C6 C7 C8 C9 C10 C11 C12 C14 C15 C18 C19 C26 C28: library part Cap-00005, "Cap Ceramic 0.1uF 50V X7R 10% Pad SMD 0402 125C Automotive T/R", Case Code (Imperial)=0402, Case Code (Metric)=1005, Dielectric Material=Ceramic, LCSC Part Number=C307331, Manufacturer=Murata, Manufacturer Part Number=GRT155R71H104KE01D, Supplier Part Number 1=490-GRT155R71H104KE01DCT-ND, Voltage Rating (DC)=50V, Case/Package=0402, Category="Ceramic Capacitors", Mount="Surface Mount", Number of Pins=2, Part Name=Cap-00005, Pricing 1="1=0.10000, 10=0.04700, 50=0.02580, 100=0.0211", RoHS=Yes, RoHS Compliant=Yes, Stock 1=179948, Supplier 1=Digi-Key, Termination=SMD/SMT
C2 C3 C22 C23 C24 C30 C31: library part Cap-00003, "CAP CER 1UF 10V Y5V 0402", Case Code (Imperial)=0402, Case Code (Metric)=1005, Dielectric Material=Ceramic, LCSC Part Number=C52923, Manufacturer=KEMET, Manufacturer Part Number=C0402C105Z8VAC7867, Max Operating Temperature=85°C, Min Operating Temperature=-30°C, Supplier Part Number 1=399-14873-1-ND, Tolerance=80%, Voltage Rating=10V, Capacitance=1uF, Case/Package=0402, Category="Ceramic Capacitors", ComponentLink1Description=https://api.kemet.com/component-edge/download, ComponentLink1URL=https://api.kemet.com/component-edge/download, Mount="Surface Mount", Number of Pins=2, Packaging="Cut Tape", Part Name=Cap-00003, Pricing 1="1=0.28000, 10=0.18900, 50=0.12580, 100=0.1070", RoHS=Yes, Stock 1=9702, Supplier 1=Digi-Key, Termination=SMD/SMT
C20: library part Cap-00006, "CAP CER 0.47UF 16V Y5V 0402", Capacitance=470nF, Case Code (Imperial)=0402, Case Code (Metric)=1005, Dielectric=Y5V, Dielectric Material=Ceramic, LCSC Part Number=C527993, Manufacturer=Yageo, Manufacturer Part Number=CC0402ZRY5V7BB474, Max Operating Temperature=85°C, Min Operating Temperature=-30°C, Supplier Part Number 1=311-1735-1-ND, Tolerance=80%, Voltage Rating=16V, Case/Package=0402, Category="Ceramic Capacitors", ComponentLink1Description=https://datasheet.ciiva.com/26862/getdatashee, ComponentLink1URL=https://datasheet.ciiva.com/26862/getdatashee, Depth=0.5mm, Halogen Free="Halogen Free", Lead Free="Lead Free", Length=1mm, Mount="Surface Mount", Packaging="Tape and Reel", Part Name=Cap-00006, Pricing 1="1=0.10000, 10=0.07700, 50=0.04180, 100=0.0342", Radiation Hardening=No, Resistor Type=Ceramic, RoHS=Yes, RoHS Compliant=Yes, Series=CC, Stock 1=154263, Supplier 1=Digi-Key, Termination=SMD/SMT, Thickness=0.022inch, Voltage Rating (DC)=16V, Weight=2.3E-05oz, Width=0.02inch
C25: library part Cap-00001, "CAP CER 4.7UF 16V X5R 0603", Case Code (Imperial)=0603, Case Code (Metric)=1608, Dielectric=X5R, Dielectric Material=Ceramic, LCSC Part Number=C19666, Manufacturer=Samsung, Manufacturer Part Number=CL10A475KO8NNNC, Max Operating Temperature=85°C, Min Operating Temperature=-55°C, Package Quantity=1, Supplier Part Number 1=1276-1784-1-ND, Tolerance=10%, Voltage=16V, Capacitance=4.7uF, Case/Package=0603, Category="Ceramic Capacitors", ComponentLink1Description=https://datasheet.ciiva.com/25795/cl10a475ko8, ComponentLink1URL=https://datasheet.ciiva.com/25795/cl10a475ko8, ComponentLink2Description=https://datasheet.ciiva.com/26838/getdatashee, ComponentLink2URL=https://datasheet.ciiva.com/26838/getdatashee, ComponentLink3Description=https://datasheet.ciiva.com/29198/457663-da-0, ComponentLink3URL=https://datasheet.ciiva.com/29198/457663-da-0, Construction=Flat, Contact Plating=Tin, Depth=0.8mm, Height=0.8mm, Length=1.6mm, Material=Ceramic, Mount="Surface Mount", Number of Pins=2, Packaging="Tape and Reel", Part Name=Cap-00001, Pricing 1="1=0.13000, 10=0.09100, 50=0.05180, 100=0.0429", Radiation Hardening=No, RoHS=Yes, RoHS Compliant=Yes, Series=CL, Stock 1=1593998, Supplier 1=Digi-Key, Termination=SMD/SMT, Thickness=0.035inch, Voltage Rating=16V, Width=0.031inch
C27: library part Cap-00004, "CAP CER 47UF 16V X5R 1210", Case Code (Imperial)=1210, Case Code (Metric)=3225, Dielectric=X5R, Dielectric Material=Ceramic, LCSC Part Number=C77101, Manufacturer=Murata, Manufacturer Part Number=GRM32ER61C476ME15L, Max Operating Temperature=85°C, Min Operating Temperature=-55°C, Package Quantity=1000, Supplier Part Number 1=490-3888-1-ND, Tolerance=20%, Voltage=16V, Capacitance=47uF, Case/Package=1210, Category="Ceramic Capacitors", ComponentLink1Description=https://datasheet.ciiva.com/141/product-14197, ComponentLink1URL=https://datasheet.ciiva.com/141/product-14197, ComponentLink2Description=https://datasheet.ciiva.com/14116/grm32er61c4, ComponentLink2URL=https://datasheet.ciiva.com/14116/grm32er61c4, ComponentLink3Description=https://datasheet.ciiva.com/7719/415303-77191, ComponentLink3URL=https://datasheet.ciiva.com/7719/415303-77191, ComponentLink4Description=https://datasheet.ciiva.com/141/partnumbering, ComponentLink4URL=https://datasheet.ciiva.com/141/partnumbering, ComponentLink5Description=https://datasheet.ciiva.com/141/partnumbering, ComponentLink5URL=https://datasheet.ciiva.com/141/partnumbering, ComponentLink6Description=https://datasheet.ciiva.com/16343/c02e-163436, ComponentLink6URL=https://datasheet.ciiva.com/16343/c02e-163436, Depth=2.5mm, Height=2.5mm, Lead Free="Lead Free", Length=3.2mm, Mount="Surface Mount", Number of Pins=2, Packaging="Tape and Reel", Part Name=Cap-00004, Pricing 1="1=0.73000, 10=0.53900, 50=0.43120, 100=0.3697", REACH SVHC="No SVHC", RoHS=Yes, RoHS Compliant=Yes, Series=GRM, Stock 1=238447, Supplier 1=Digi-Key, Termination=SMD/SMT, Thickness=0.106inch, Voltage Rating=16V, Voltage Rating (DC)=16V, Width=0.098inch
D1 D4 D5 D6 D7: library part Diode-0009, "DIODE SCHOTTKY 30V 150MA SOT23-3", LCSC Part Number=C47546, Manufacturer="Sangdest Microelectronics", Package Description="3-Pin Small Outline Transistor, Body 2.92 x 1.325 mm, Pitch 0.95 mm", Package Reference=SOT23-3, Package Version="Rev. 12, 03/2016", Peak Reverse Current=2uA, Supplier Part Number 1=1655-BAT54SCT-ND, Component Type=Diodes, Datasheet URL=https://www.fairchildsemi.com/datasheets/BA/BAT54S.pdf, Datasheet Version="Rev. 2.3, 04/2016", Elements=2, Lead Free="Lead Free", Manufacturer Part Number=BAT54S, Manufacturer URL=https://www.fairchildsemi.com/, Mount="Surface Mount", Mounting Technology=SM, Package URL=http://www.fairchildsemi.com/dwg/MA/MA03D.pdf, Part Name=Diode-0009, Pins=3, Pricing 1="1=0.43000, 10=0.35100, 100=0.18620, 500=0.122", Radiation Hardening=No, Recovery Time=5ns, RoHS=Yes, Stock 1=168252, Supplier 1=Digi-Key
D9: library part Diode-0002, "DIODE SCHOTTKY 40V 1A SOD323", Average Rectified Current=1A, Case Code (Imperial)=sod123, Color=Blue, Forward Current=25mA, Forward Voltage="600mV @ 1A", LCSC Part Number=C84354, Manufacturer=MCC, Manufacturer Part Number="B5819W TP", Max Operating Temperature=85°C, Max Reverse Voltage (DC)=40V, Min Operating Temperature=-40°C, Package Description="2-Pin Small Outline Diode, Body 2.7 x 1.6 mm, Height 1.35 mm", Package Reference=SOD123, Power Dissipation=110W, Reverse Voltage=5V, Supplier Part Number 1=5819W-TPMSTR-ND, Test Current=20mA, Case/Package=sod123, Category="Rectifier Diodes", Component Type=Diodes, ComponentLink1Description=https://datasheet.ciiva.com/16302/19-217-bhc-, ComponentLink1URL=https://datasheet.ciiva.com/16302/19-217-bhc-, ComponentLink2Description=https://datasheet.ciiva.com/26901/getdatashee, ComponentLink2URL=https://datasheet.ciiva.com/26901/getdatashee, Datasheet URL=http://www.mccsemi.com/up_pdf/B5817W-B5819W(SOD-123).pdf, Datasheet Version="Rev. B, 01/2013", Depth=0.8mm, Dominant Wavelength=470nm, Lead Free="Lead Free", Length=1.6mm, Lens Style=Diffused,Colorless,Rectangular,Clear, Luminous Intensity=28.5mcd, Manufacturer URL=http://www.mccsemi.com/, Mount="Surface Mount", Mounting Technology=SM, Number of Elements=1, Number of LEDs=1, Package URL=http://www.mccsemi.com/up_pdf/1N4448W(SOD-123).pdf, Packaging="Tape and Reel", Part Name=Diode-0002, Pricing 1="1=0.47000, 10=0.35200, 100=0.19930, 500=0.132", Radiation Hardening=No, RoHS=Yes, RoHS Compliant=Yes, Stock 1=237825, Supplier 1=Digi-Key, Viewing Angle=120°
D10: library part Diode-0008, "Rectifier Diode Schottky 40V 2A Automotive 2-Pin SMB T/R", Average Rectified Current=200mA, Capacitance=10pF, Case/Package=SMB, Forward Voltage=800mV, LCSC Part Number=C460673, Manufacturer=Diodes, Max Forward Surge Current (Ifsm)=600mA, Max Operating Temperature=150°C, Max Power Dissipation=200mW, Max Repetitive Reverse Voltage (Vrrm)=30V, Max Reverse Current=2uA, Min Operating Temperature=-65°C, Package Description="2-Pin Small Outline Diode, Body 2.7 x 1.6 mm, Height 1.35 mm", Package Quantity=3000, Package Reference=SOD123, Supplier Part Number 1=B240Q-13-FDICT-ND, Category="Rectifier Diodes", Component Type=Diodes, ComponentLink1Description=https://datasheet.ciiva.com/34302/1539235-343, ComponentLink1URL=https://datasheet.ciiva.com/34302/1539235-343, ComponentLink2Description=https://datasheet.ciiva.com/22695/1911820-226, ComponentLink2URL=https://datasheet.ciiva.com/22695/1911820-226, ComponentLink3Description=https://datasheet.ciiva.com/15144/getdatashee, ComponentLink3URL=https://datasheet.ciiva.com/15144/getdatashee, Contact Plating=Tin,Matte, Current Rating=200mA, Datasheet URL=http://www.mccsemi.com/up_pdf/B5817W-B5819W(SOD-123).pdf, Datasheet Version="Rev. B, 01/2013", Forward Current=200mA, Height=1mm, Lead Free="Lead Free", Length=2.9mm, Manufacturer Part Number=B240Q-13-F, Manufacturer URL=http://www.mccsemi.com/, Max Reverse Voltage (DC)=30V, Mount="Surface Mount", Mounting Technology=SM, Number of Pins=2, Package URL=http://www.mccsemi.com/up_pdf/1N4448W(SOD-123).pdf, Packaging="Tape and Reel", Part Name=Diode-0008, Peak Non-Repetitive Surge Current=600mA, Power Dissipation=200mW, Power Rating=200mW, Pricing 1="1=0.40000, 10=0.32600, 100=0.22180, 500=0.166", Radiation Hardening=No, REACH SVHC="No SVHC", Reverse Recovery Time=5ns, RoHS=Yes, RoHS Compliant=Yes, Series=-, Stock 1=9228, Supplier 1=Digi-Key, Termination=SMD/SMT, Voltage Rating (DC)=30V, Weight=0.000282oz, Width=1.3mm
DS5 DS12: library part Diode-0005, "LED RED CLEAR 0603 SMD", Case Code (Imperial)=0603, Case Code (Metric)=1608, Color=Red, Forward Current=5mA, Forward Voltage=2.0V, LCSC Part Number=C2286, Lens Color=Colorless, Manufacturer="Vishay Lite-On", Max Operating Temperature=85°C, Min Operating Temperature=-55°C, Operating Temp Range=-40Cto85C, Operating Temperature Classification=Industrial, Package Description="2-Pin Surface Mount Device, Body 3.2 x 1.6 mm", Package Quantity=3000, Package Reference=HSMX-C150, Package Type=ChipLed, Power Dissipation=50mW, Reverse Voltage=5V, Supplier Part Number 1=160-1830-1-ND, Test Current (It)=20mA, Case/Package=0603, Category=LEDs, Chip Material=GaAlAs, ComponentLink1Description=https://datasheet.ciiva.com/11775/0900766b80d, ComponentLink1URL=https://datasheet.ciiva.com/11775/0900766b80d, ComponentLink2Description=https://datasheet.ciiva.com/4689/100-ltst-c19, ComponentLink2URL=https://datasheet.ciiva.com/4689/100-ltst-c19, ComponentLink3Description=https://datasheet.ciiva.com/16210/ltst-c193kr, ComponentLink3URL=https://datasheet.ciiva.com/16210/ltst-c193kr, ComponentLink4Description=https://datasheet.ciiva.com/2110/s-110-ltst-c, ComponentLink4URL=https://datasheet.ciiva.com/2110/s-110-ltst-c, Datasheet URL=http://media.digikey.com/pdf/Data%20Sheets/Avago%20PDFs/HSMz-Czzz.pdf, Datasheet Version=03/2012, DELETED=Compliant, Depth=0.8mm, Dominant Wave Length=639nm, Dominant Wavelength=631nm, Emitting Color=Red, Height=0.35mm, High Brightness=No, Illumination Color=Red, Lead Free="Lead Free", Length=1.6mm, Lens Dimensions=2x1.6x0.6mm, Lens Style=Diffused,Colorless,Clear,Rectangular, Lens Transparency=Clear, Lens Type=ColorlessDiffused, Lum Intensity=17mcd, Luminous Intensity=45mcd, Main Category=ChipLED, Manufacturer Part Number=LTST-C193KRKT-5A, Manufacturer URL=http://www.avagotech.com/, Mount="Surface Mount", Mounting=SurfaceMount, Mounting Technology=SurfaceMount, Number of  Elements=1, Number of Elements=1, Number of LEDs=1, Number of Pins=2, Packaging="Tape and Reel", Part Name=Diode-0005, Peak Wavelength=660nm, Pin Count=2, Pricing 1="1=0.39000, 10=0.20900, 100=0.09720, 500=0.089", Product Depth (mm)=1.6mm, Product Height (mm)=1.1mm, Product Length (mm)=3.2mm, Rad Hardened=No, Radiation Hardening=No, RoHS=Yes, RoHS Compliant=Yes, Series=-, Shape Type=Rectangular, Stock 1=476214, Supplier 1=Digi-Key, Test Current=5mA, Type=Uni-Color, Viewing Angle=130°, Width=0.8mm
DS6: library part Diode-0003, "LED Blue CLEAR 0603 SMD", Case Code (Imperial)=0603, Case Code (Metric)=1608, Color=Blue, Forward (Drive) Current=20mA, Forward Voltage=2.8V, LCSC Part Number=C72041, Lens Color=Colorless, Manufacturer="Vishay Lite-On", Max Operating Temperature=80°C, Min Operating Temperature=-20°C, Package Description="2-Pin Surface Mount Device, Body 1.6 x 0.8 mm", Package Quantity=1, Power Dissipation=76mW, Reverse Voltage=5V, Supplier Part Number 1=160-1827-1-ND, Test Current=5mA, Case/Package=0603, Category=LEDs, ComponentLink1Description=https://datasheet.ciiva.com/2111/ltst-c193tbk, ComponentLink1URL=https://datasheet.ciiva.com/2111/ltst-c193tbk, ComponentLink2Description=https://datasheet.ciiva.com/11773/0900766b80d, ComponentLink2URL=https://datasheet.ciiva.com/11773/0900766b80d, ComponentLink3Description=https://datasheet.ciiva.com/4688/lite-on-ltst, ComponentLink3URL=https://datasheet.ciiva.com/4688/lite-on-ltst, ComponentLink4Description=https://datasheet.ciiva.com/16210/ltst-c193tb, ComponentLink4URL=https://datasheet.ciiva.com/16210/ltst-c193tb, ComponentLink5Description=https://datasheet.ciiva.com/15201/getdatashee, ComponentLink5URL=https://datasheet.ciiva.com/15201/getdatashee, ComponentLink6Description=https://datasheet.ciiva.com/2111/p-100-ltst-c, ComponentLink6URL=https://datasheet.ciiva.com/2111/p-100-ltst-c, ComponentLink7Description=https://datasheet.ciiva.com/2111/p-100-ltst-c, ComponentLink7URL=https://datasheet.ciiva.com/2111/p-100-ltst-c, Datasheet URL=https://datasheet.ciiva.com/11773/0900766b80df3ad8-11773825.pdf, Datasheet Version="Rev. 2.0, 03/2010", Depth=0.8mm, Dimension=1.6x0.8x0.36mm, Dominant Wavelength=475nm, Forward Current=20mA, Height=0.35mm, Illumination Color=Blue, Intensity=22mcd, Lead Free="Lead Free", Length=1.6mm, Lens Style=Diffused,Colorless,Rectangular,Clear, Lens Transparency=Clear, Lens Type=Clear, Luminous Intensity=15mcd, Manufacturer Part Number=LTST-C193TBKT-5A, Manufacturer URL=http://www.rohm.com/web/global/, Mount="Surface Mount", Mounting Technology=SurfaceMount, Number of Elements=1, Number of LEDs=1, Number of Pins=2, Package Reference=1608, Packaging="Tape and Reel", Part Name=Diode-0003, Pricing 1="1=0.30000, 10=0.23400, 100=0.10510, 500=0.094", Radiation Hardening=No, RoHS=Yes, RoHS Compliant=Yes, Stock 1=654851, Supplier 1=Digi-Key, Viewing Angle=130°, Width=0.8mm
DS8: library part Diode-0006, "LED Yellow CLEAR 0603 SMD", Case Code (Imperial)=0603, Case Code (Metric)=1608, Color=Yellow, Forward Current=30mA, Forward Voltage=2.0V, LCSC Part Number=C72038, Lens Color=Colorless, Manufacturer="Vishay Lite-On", Max Operating Temperature=85°C, Min Operating Temperature=-55°C, Package Quantity=1, Power Dissipation=75mW, Resistance="390 Ohm", Reverse Voltage=5V, Supplier Part Number 1=160-1831-1-ND, Test Current=5mA, Voltage Rating="50 V", Case/Package=0603, Case\Package=0603, Category=LEDs, ComponentLink1Description=https://datasheet.ciiva.com/11775/0900766b80d, ComponentLink1URL=https://datasheet.ciiva.com/11775/0900766b80d, ComponentLink2Description=https://datasheet.ciiva.com/4688/lite-on-ltst, ComponentLink2URL=https://datasheet.ciiva.com/4688/lite-on-ltst, ComponentLink3Description=https://datasheet.ciiva.com/26890/getdatashee, ComponentLink3URL=https://datasheet.ciiva.com/26890/getdatashee, ComponentLink4Description=https://datasheet.ciiva.com/2110/s-110-ltst-c, ComponentLink4URL=https://datasheet.ciiva.com/2110/s-110-ltst-c, ComponentLink5Description=https://datasheet.ciiva.com/2110/s-110-ltst-c, ComponentLink5URL=https://datasheet.ciiva.com/2110/s-110-ltst-c, ComponentLink6Description=https://datasheet.ciiva.com/2110/s-110-ltst-c, ComponentLink6URL=https://datasheet.ciiva.com/2110/s-110-ltst-c, ComponentLink7Description=https://datasheet.ciiva.com/2110/ltst-c193kfk, ComponentLink7URL=https://datasheet.ciiva.com/2110/ltst-c193kfk, DatasheetVersion=Mar-12, Depth=0.8mm, Dominant Wavelength=594.5nm, Height=0.35mm, Illumination Color=Yellow, Lead Free="Lead Free", Length=1.6mm, Lens Style=Diffused,Colorless,Rectangular, Lens Transparency=Clear, Luminous Intensity=45mcd, Manufacturer Part Number=LTST-C193KSKT-5A, Mount="Surface Mount", Number of Elements=1, Number of LEDs=1, Number of Pins=2, PackageDescription="2-Pin Surface Mount Device, Body 1.6 x 0.8 mm, Height 0.9 mm", PackageReference=HSMX-C190, Packaging="Tape and Reel", Part Name=Diode-0006, Pins=2, Power Rating=75mW, Pricing 1="1=0.39000, 10=0.20900, 100=0.09720, 500=0.089", Radiation Hardening=No, RoHS=Yes, RoHS Compliant=Yes, RoHSCompliant=true, Stock 1=147319, Supplier 1=Digi-Key, Viewing Angle=130°, Width=0.8mm
DS9: library part Diode-0004, "LED Orange CLEAR 0603 SMD", Case Code (Imperial)=0603, Case Code (Metric)=1608, Color=Orange, Forward (Drive) Current=20mA, Forward Current=5mA, Forward Voltage=2.0V, LCSC Part Number=C434425, Lens Color=Colorless, Manufacturer="Vishay Lite-On", Max Operating Temperature=85°C, Min Operating Temperature=-55°C, Package Description="2-Pin Surface Mount Device, Body 1.6 x 0.8 mm", Supplier Part Number 1=160-1829-1-ND, Case/Package=0603, Category=LEDs, Datasheet URL=https://datasheet.ciiva.com/11773/0900766b80df3ad8-11773825.pdf, Datasheet Version="Rev. 2.0, 03/2010", Dimension=1.6x0.8x0.36mm, Dominant Wavelength=605nm, Height=0.35mm, Illumination Color=Orange, Intensity=22mcd, Lead Free="Lead Free", Lens Style=Diffused,Colorless,Rectangular,Clear, Lens Transparency=Clear, Lens Type=Clear, Luminous Intensity=28.1mcd, Manufacturer Part Number=LTST-C193KFKT-5A, Manufacturer URL=http://www.rohm.com/web/global/, Mount="Surface Mount", Mounting Technology=SurfaceMount, Number of Elements=1, Number of Pins=2, Package Reference=1608, Packaging="Tape and Reel", Part Name=Diode-0004, Pricing 1="1=0.39000, 10=0.20900, 100=0.09720, 500=0.089", Radiation Hardening=No, RoHS=Yes, RoHS Compliant=Yes, Stock 1=55639, Supplier 1=Digi-Key, Viewing Angle=130°, Width=0.8mm
DS11: library part Diode-0007, "LED Green CLEAR 0603 SMD", Average Rectified Current=2A, Case Code (Imperial)=0603, Case Code (Metric)=1608, Case\Package=SOIC, Clock Frequency="100 KHz", Color=Green, Forward Current=5mA, Forward Voltage=2.0V, Frequency="400 KHz", LCSC Part Number=C72043, Lens Color=Colorless, Manufacturer="Vishay Lite-On", Max Operating Temperature=80°C, Max Repetitive Reverse Voltage (Vrrm)=40V, Max Reverse Current=500uA, Max Supply Voltage="5.5 V", Min Operating Temperature=-20°C, Min Supply Voltage="1.7 V", Nominal Supply Current="2 mA", Package Quantity=3000, Peak Non-Repetitive Surge Current=50A, Power Dissipation=76mW, Reverse Voltage=5V, Supplier Part Number 1=160-1832-1-ND, Access Time="3500 ns", Case/Package=0603, Category=LEDs, ComponentLink1Description=https://datasheet.ciiva.com/2111/ltst-c193tgk, ComponentLink1URL=https://datasheet.ciiva.com/2111/ltst-c193tgk, ComponentLink2Description=https://datasheet.ciiva.com/11775/0900766b80d, ComponentLink2URL=https://datasheet.ciiva.com/11775/0900766b80d, ComponentLink3Description=https://datasheet.ciiva.com/4689/lite-on-ltst, ComponentLink3URL=https://datasheet.ciiva.com/4689/lite-on-ltst, ComponentLink4Description=https://datasheet.ciiva.com/2111/p-100-ltst-c, ComponentLink4URL=https://datasheet.ciiva.com/2111/p-100-ltst-c, ComponentLink5Description=https://datasheet.ciiva.com/2111/p-100-ltst-c, ComponentLink5URL=https://datasheet.ciiva.com/2111/p-100-ltst-c, ComponentLink6Description=http://www.mouser.com/ds/2/115/B220AQ_Q-B260A, ComponentLink6URL=http://www.mouser.com/ds/2/115/B220AQ_Q-B260A, ComponentLink7Description=https://www.diodes.com/assets/Datasheets/ds13, ComponentLink7URL=https://www.diodes.com/assets/Datasheets/ds13, ComponentLink8Description=http://www.diodes.com/datasheets/ds13004.pdf?, ComponentLink8URL=http://www.diodes.com/datasheets/ds13004.pdf?, Contact Plating=Tin,Matte, DatasheetVersion=Mar-12, Density="32 kb", Depth=0.8mm, Dominant Wavelength=535nm, Element Configuration=Single, Height=0.35mm, Illumination Color=Green, Lead Free="Lead Free", Length=1.6mm, Lens Style=Diffused,Colorless,Rectangular, Lens Transparency=Clear, Luminous Intensity=280mcd, Manufacturer Part Number=LTST-C193TGKT-5A, Max Clock Frequency="100 KHz", Max Reverse Voltage (DC)=40V, Mount="Surface Mount", Number of Elements=1, Number of LEDs=1, Number of Pins=2, PackageDescription="2-Pin Surface Mount Device, Body 1.6 x 0.8 mm, Height 0.9 mm", PackageReference=HSMX-C190, Packaging="Tape and Reel", Part Name=Diode-0007, Pins=8, Pricing 1="1=0.45000, 10=0.27400, 100=0.15780, 1000=0.12", Radiation Hardening=No, RoHS=Yes, RoHS Compliant=Yes, RoHSCompliant=true, Series=-, Stock 1=429188, Supplier 1=Digi-Key, Test Current=5mA, Viewing Angle=130°, Width=0.8mm
F1 F2: library part MF-MSMF050-2, "15VDC 500mA", Case Code (Imperial)=1812, Case Code (Metric)=4532, Current Rating=100A, LCSC Part Number=C17313, Manufacturer=Bourns, Max Operating Temperature=85°C, Min Operating Temperature=-40°C, Operating Supply Voltage=15V, Package Description="2-Pin Surface Mount Device, Body 4.55 x 3.24 mm", Package Quantity=2000, Power Dissipation=800mW, Resistance=150mR, Supplier Part Number 1=MF-MSMF050-2CT-ND, Trip Current=1A, Aging="1000 hr @ +85 °C (Passive)", Approvals=UL,CSA,TUV, Case/Package=1812, Category="PTC Resettable Fuses", Component Type=Fuses, ComponentLink1Description=https://datasheet.ciiva.com/34302/1164200-343, ComponentLink1URL=https://datasheet.ciiva.com/34302/1164200-343, ComponentLink2Description=https://datasheet.ciiva.com/1228/1786007-1228, ComponentLink2URL=https://datasheet.ciiva.com/1228/1786007-1228, ComponentLink3Description=https://datasheet.ciiva.com/32426/mf-msmf-ser, ComponentLink3URL=https://datasheet.ciiva.com/32426/mf-msmf-ser, ComponentLink4Description=https://datasheet.ciiva.com/22749/1695373-227, ComponentLink4URL=https://datasheet.ciiva.com/22749/1695373-227, ComponentLink5Description=https://datasheet.ciiva.com/46395/1695373-463, ComponentLink5URL=https://datasheet.ciiva.com/46395/1695373-463, ComponentLink6Description=https://datasheet.ciiva.com/4501/mfmsmf-72300, ComponentLink6URL=https://datasheet.ciiva.com/4501/mfmsmf-72300, ComponentLink7Description=https://datasheet.ciiva.com/14537/70153434-14, ComponentLink7URL=https://datasheet.ciiva.com/14537/70153434-14, ComponentLink8Description=https://datasheet.ciiva.com/1274/1786007-1274, ComponentLink8URL=https://datasheet.ciiva.com/1274/1786007-1274, ComponentLink9Description=https://datasheet.ciiva.com/1274/1786007-1274, ComponentLink9URL=https://datasheet.ciiva.com/1274/1786007-1274, ComponentLink10Description=https://datasheet.ciiva.com/3019/mfmsmf-30196, ComponentLink10URL=https://datasheet.ciiva.com/3019/mfmsmf-30196, ComponentLink11Description=https://datasheet.ciiva.com/16205/mfmsmf-1620, ComponentLink11URL=https://datasheet.ciiva.com/16205/mfmsmf-1620, ComponentLink12Description=https://datasheet.ciiva.com/15226/getdatashee, ComponentLink12URL=https://datasheet.ciiva.com/15226/getdatashee, ComponentLink13Description=https://datasheet.ciiva.com/3019/mfmsmf-30196, ComponentLink13URL=https://datasheet.ciiva.com/3019/mfmsmf-30196, ComponentLink14Description=https://datasheet.ciiva.com/326/mfmsmf-326355, ComponentLink14URL=https://datasheet.ciiva.com/326/mfmsmf-326355, ComponentLink15Description=https://datasheet.ciiva.com/326/mfmsmf-326356, ComponentLink15URL=https://datasheet.ciiva.com/326/mfmsmf-326356, ComponentLink16Description=https://datasheet.ciiva.com/326/mfmsmf-326354, ComponentLink16URL=https://datasheet.ciiva.com/326/mfmsmf-326354, Contact Plating=Gold, Datasheet URL=http://www.bourns.com/data/global/pdfs/mfmsmf.pdf, Datasheet Version="Rev. AG, 08/2016", Height=0.85mm, Hold Current=500mA, Lead Free="Lead Free", Length=4.73mm, Manufacturer Part Number=MF-MSMF050-2, Max Current Rating=100A, Mount="Surface Mount,PCB", Mounting Technology=SM, Number of Pins=2, Number of Terminals/Pins=2, Package Reference=MF-MSMF050-2, Packaging="Tape and Reel", Part Name=MF-MSMF050-2, Pricing 1="1=0.32000, 5=0.31000, 10=0.29500, 50=0.26360,", Radiation Hardening=No, REACH SVHC="No SVHC", RoHS=Yes, RoHS Compliant=Yes, Series=MF-MSMF, Stock 1=59686, Supplier 1=Digi-Key, Terminal Material=Gold, Termination=SMD/SMT, Time to Trip=0.15s, Voltage Rating=15V, Voltage Rating (DC)=15V, Width=3.41mm
F3: library part FEMTOASMDC005F-2, "Ptc Reset Fuse 15V 50MA 0603", Case Code (Imperial)=0603, Case Code (Metric)=1608, LCSC Part Number=C2832197, Manufacturer=Littelfuse, Max Current Rating=10A, Package Description="2-Pin Surface Mount Device, Body 4.55 x 3.24 mm", Package Reference=MF-MSMF050-2, Supplier Part Number 1=F9952CT-ND, Trip Current=150mA, Case/Package=0603, Category="PTC Resettable Fuses", Component Type=Fuses, ComponentLink1Description=https://media.digikey.com/pdf/Data%20Sheets/L, ComponentLink1URL=https://media.digikey.com/pdf/Data%20Sheets/L, Datasheet URL=http://www.bourns.com/data/global/pdfs/mfmsmf.pdf, Datasheet Version="Rev. AG, 08/2016", Hold Current=50mA, Manufacturer Part Number=FEMTOASMDC005F-2, Mount="Surface Mount", Mounting Technology=SM, Packaging="Cut Tape", Part Name=FEMTOASMDC005F-2, Pricing 1="1=0.90000, 5=0.87600, 10=0.82000, 50=0.67820,", RoHS=Yes, Stock 1=11749, Supplier 1=Digi-Key, Time to Trip=100ms